# Altium PCB dalang-v1.3_20211125.PcbDoc (part 1 of 5)
Units mil, origin at the board's own origin, x right, y up, seen from the top; angles counter-clockwise.
Board outline 4000 x 3999.92 mil, 4 copper layers (Top, gnd, vcc, Bottom), stack 35.4 mil thick; 365 components, 335 nets, 1640 pads, 1414 vias.
Unrouted connection lines stored in the file: 894.
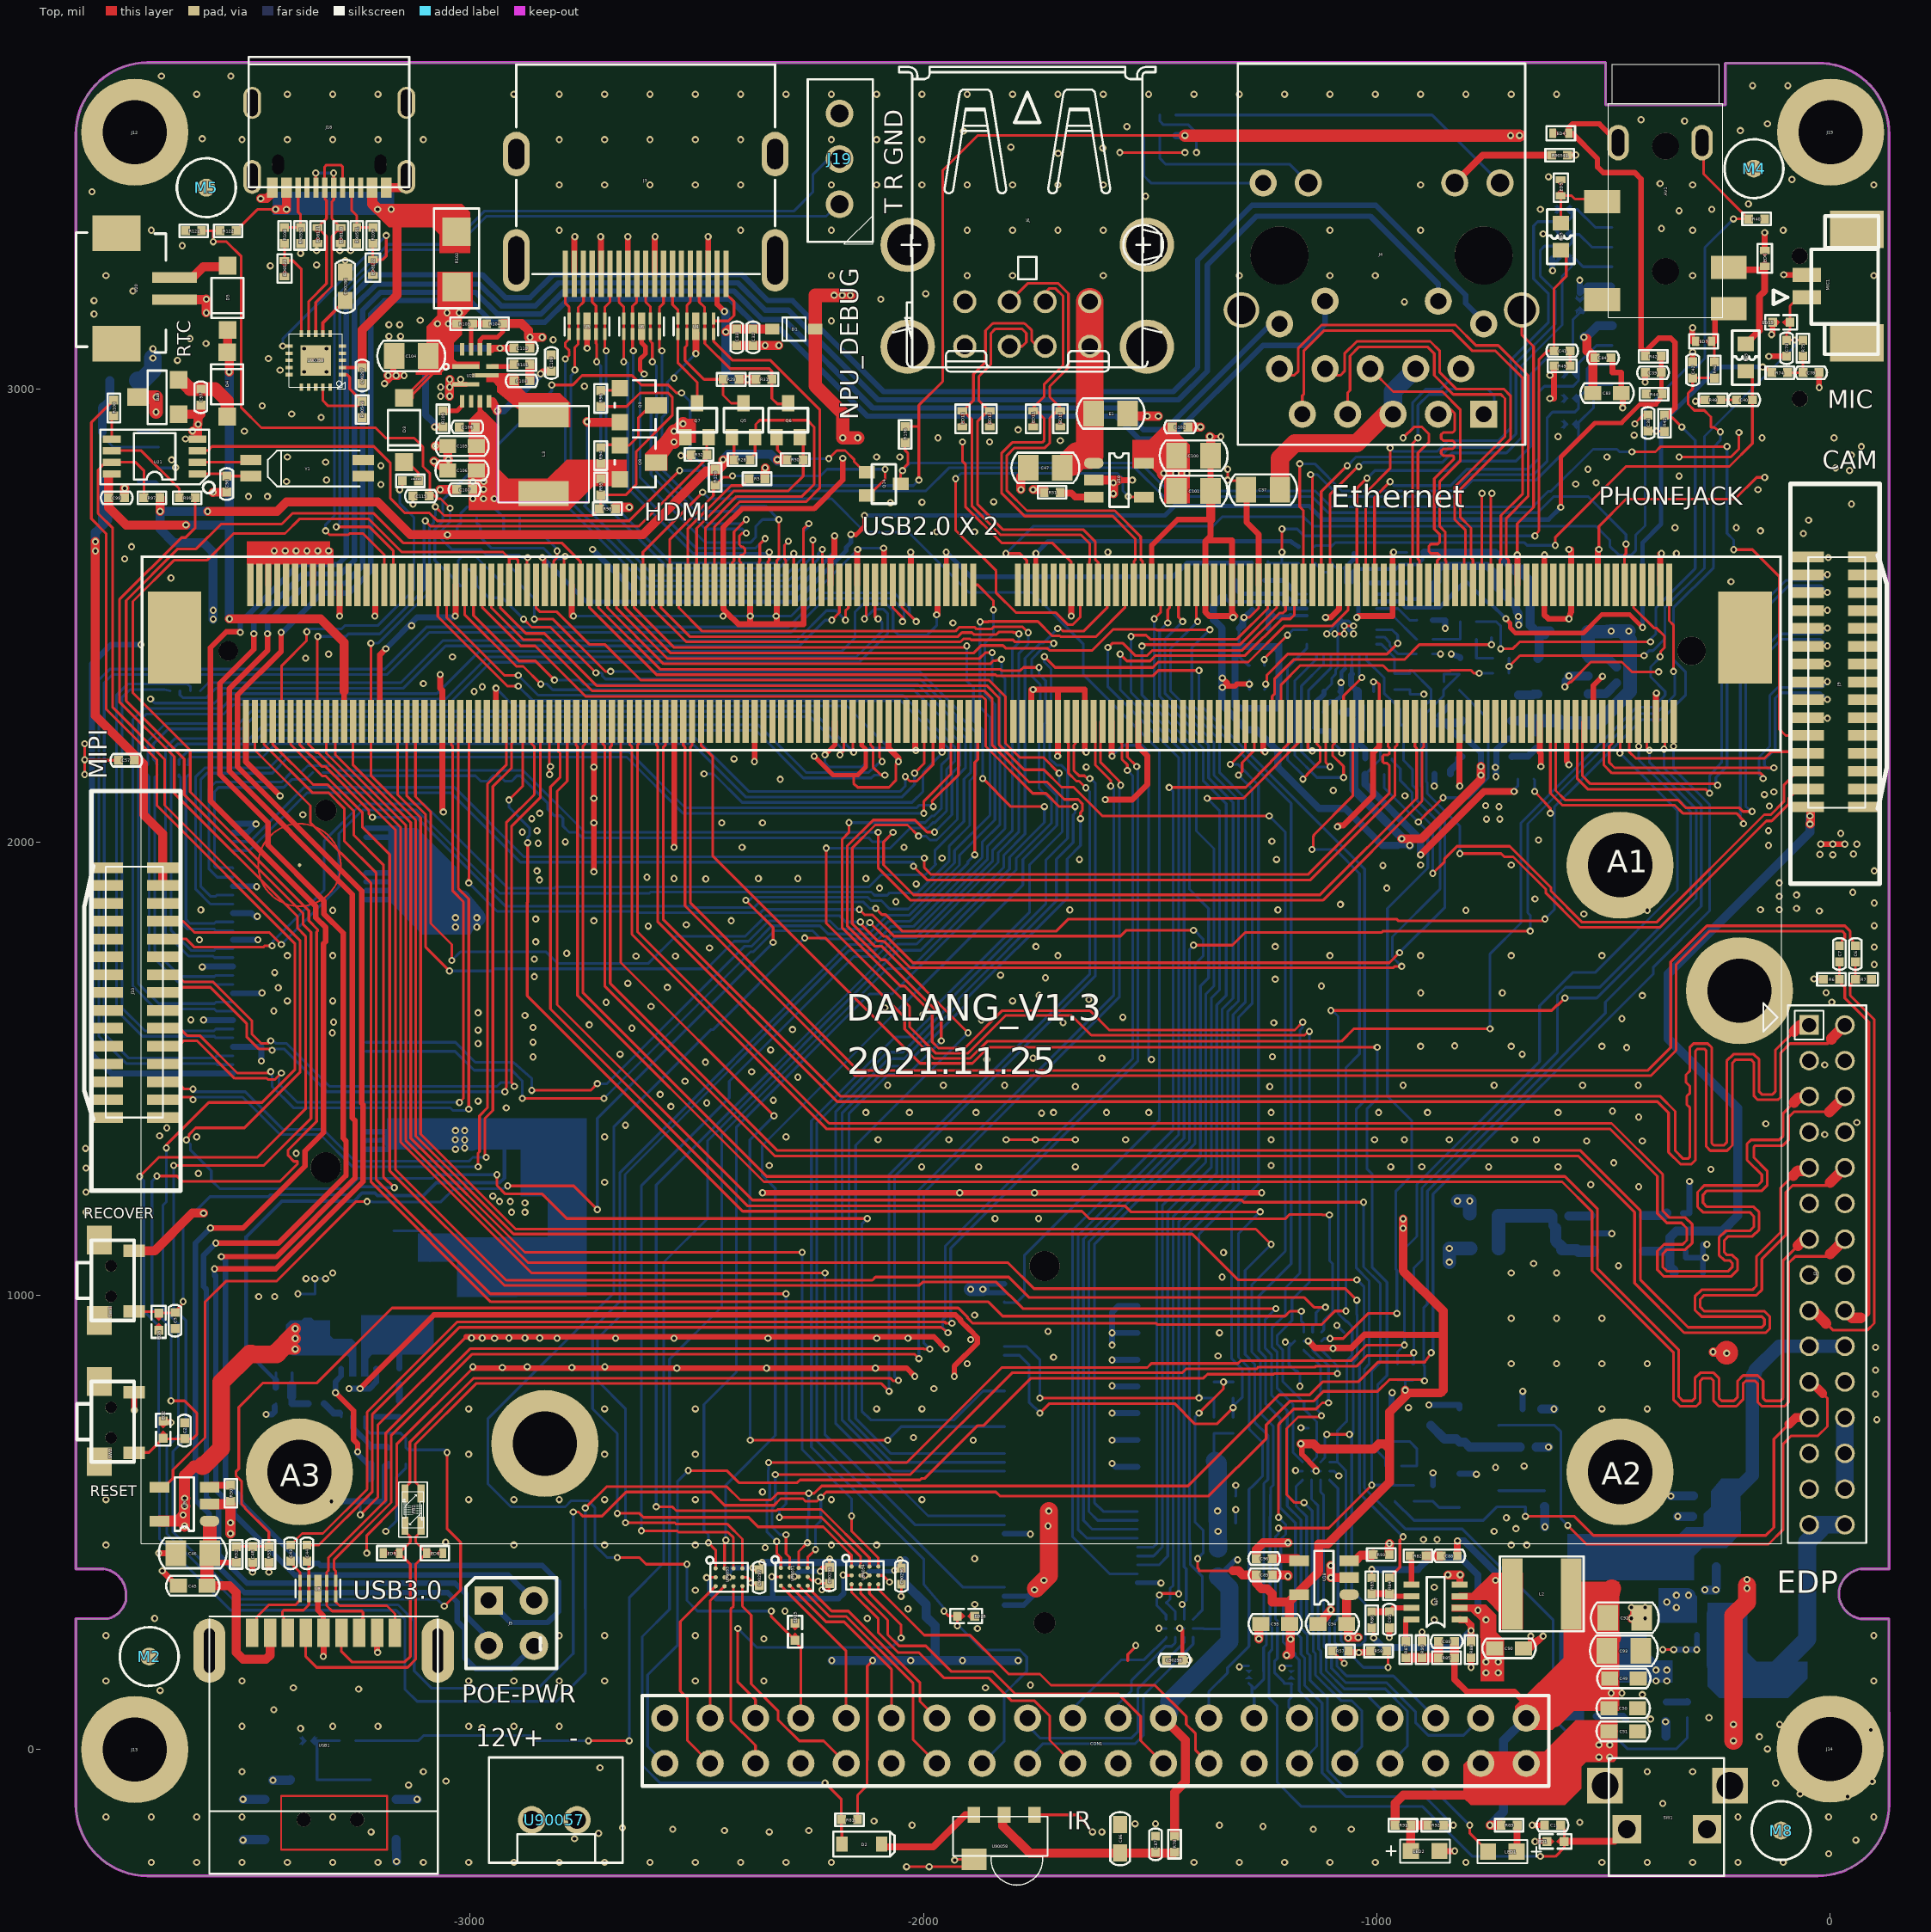
[diagram p0: Top view]
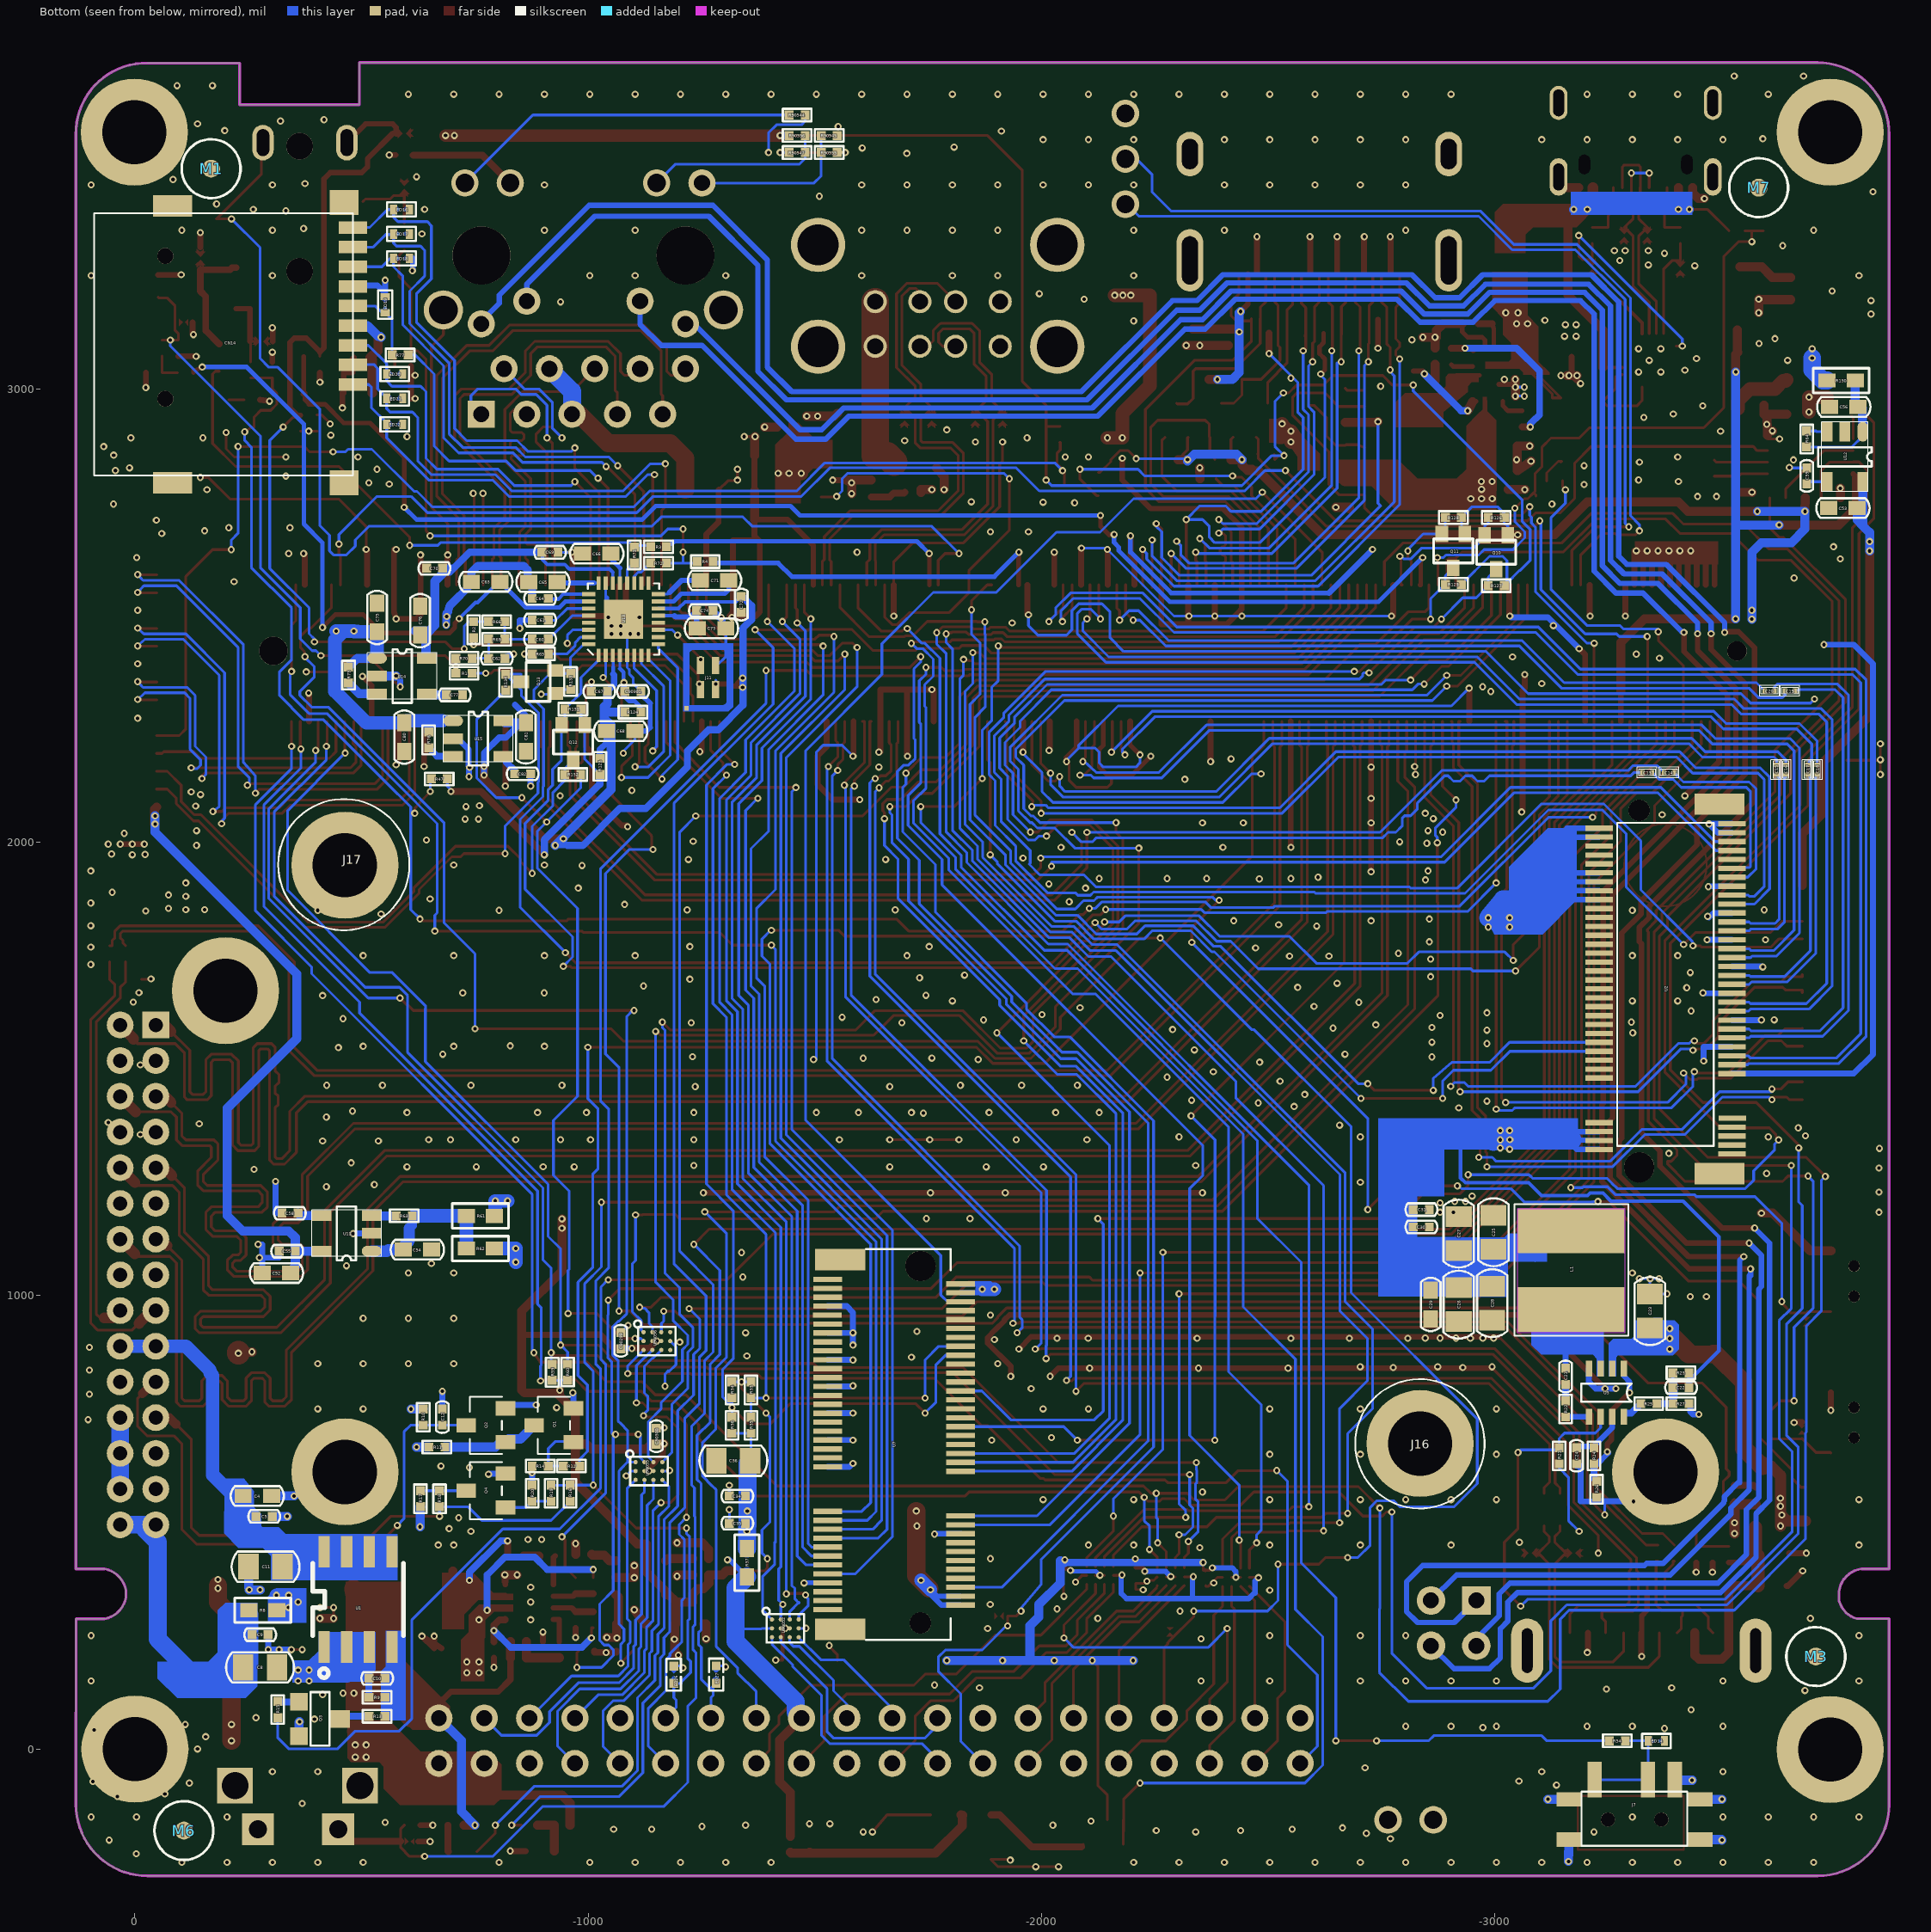
[diagram p1: Bottom view, seen from below]
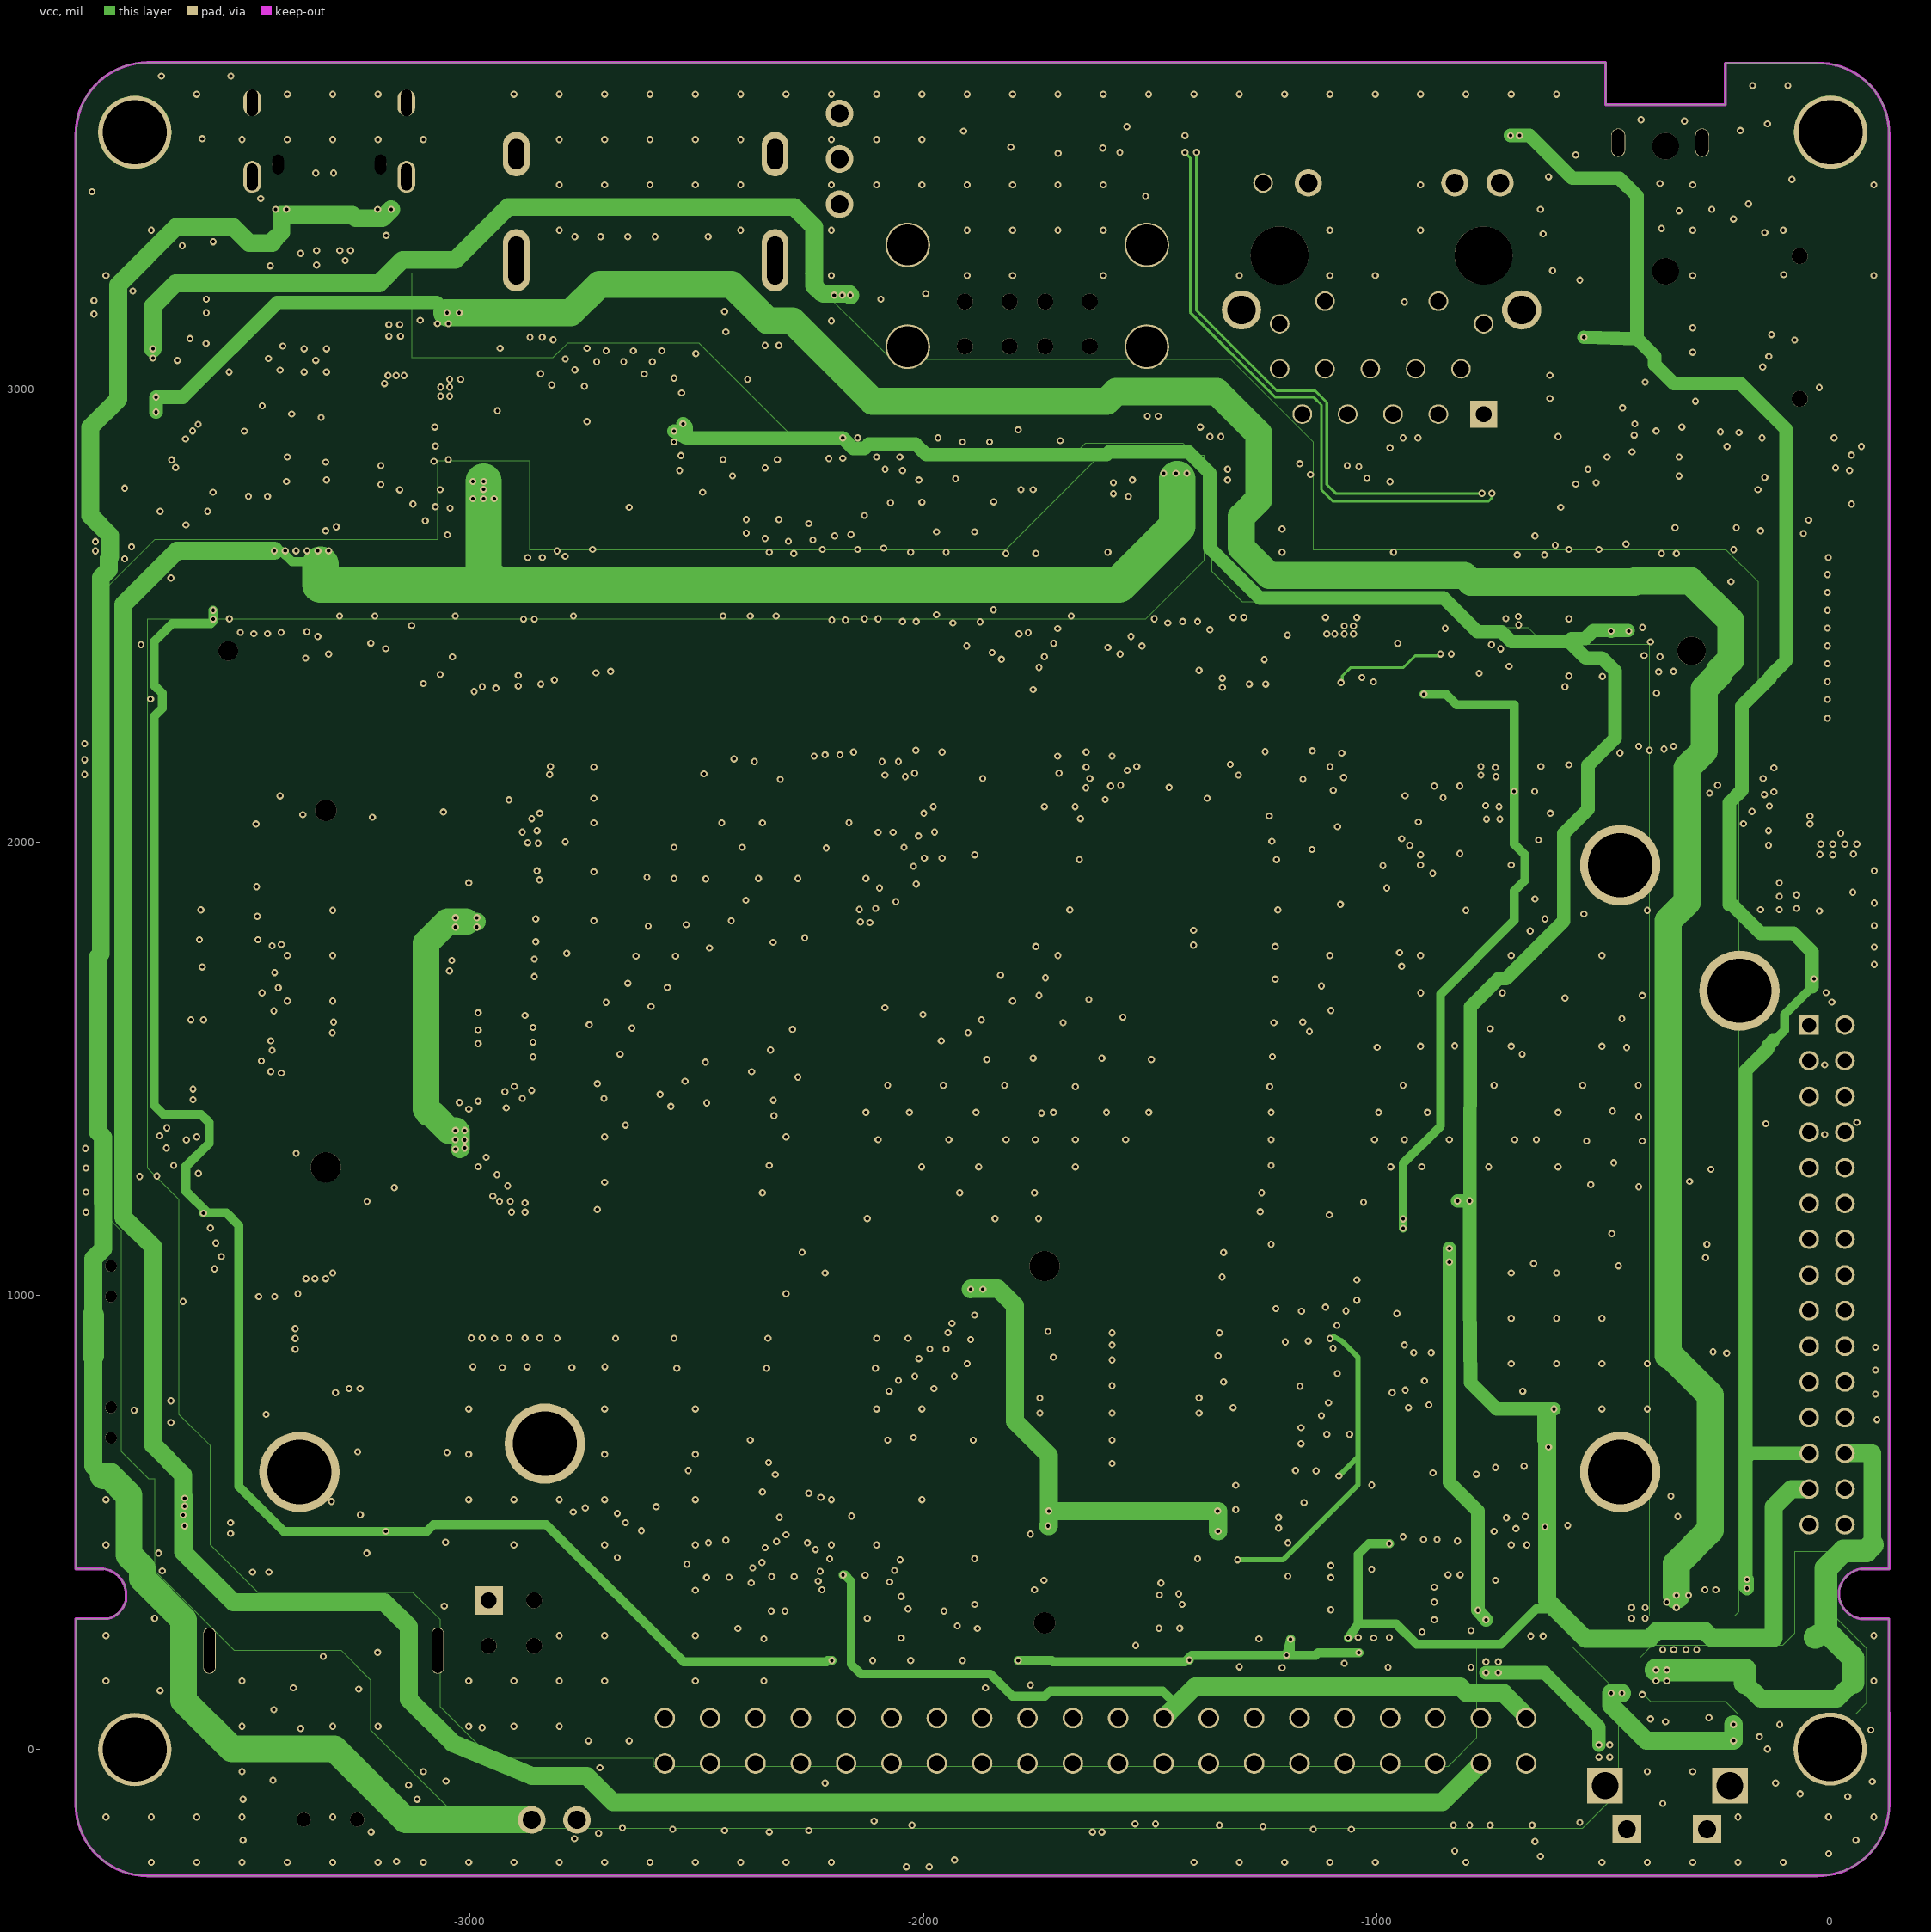
[diagram p2: vcc]

## Layer stack, top to bottom
Solder Mask Top: solder mask 0.4, Solder Resist, Dk 3.5
Top: signal copper 1.35
Dielectric 1: dielectric 10, FR-4, Dk 4.3
gnd: signal copper 1.35
Dielectric2: dielectric 10, FR-4, Dk 4.3
vcc: signal copper 1.35
Dielectric3: dielectric 10, FR-4, Dk 4.3
Bottom: signal copper 1.35
Solder Mask Bottom: solder mask 0.4, Solder Resist, Dk 3.5

## Board outline
-3869.69,3561.42 cw(c-3711.65,3561.97) -3712.2,3720 -495,3720 -495,3627 -231,3627 -231,3718.9 -27.17,3718.9 -27.16,3718.9 cw(c-25.26,3563.32) 130.31,3561.42 130.31,397.24 67.32,397.24 ccw(c77.69,339.63) 20.08,350 20.08,334.25 20.07,334.29 ccw(c77.86,344.79) 67.32,287.01 129.92,287.01 130.31,-122.44 130.31,-122.57 cw(c-27.04,-122.57) -27.17,-279.92 -3712.2,-279.92 -3712.11,-279.92 cw(c-3712.11,-122.34) -3869.69,-122.44 -3869.69,287.4 -3798.82,287.4 -3798.78,287.41 ccw(c-3812.9,340.85) -3759.45,326.77 -3759.45,348.03 ccw(c-3815.55,341.14) -3808.66,397.24 -3869.69,397.24

## Design rules (kind name [scope] priority, off if disabled: settings)
Clearance "Clearance - Default - DEFAULT- SMD" [IsVia vs IsSMTPin] p1: gap=0 ignorepadtopadclearanceinfootprint=FALSE
Clearance "Clearance - Default - DEFAULT - Via" [IsVia vs IsVia] p2: gap=0 ignorepadtopadclearanceinfootprint=FALSE
Clearance "Clearance - Default - DEFAULT - Net" [All] p3: gap=5 ignorepadtopadclearanceinfootprint=FALSE except(0: Arc-Hole Track-Hole SMDPad-Hole THPad-Hole Via-Hole Fill-Hole Poly-Hole Region-Hole Text-Hole; 4.76: Arc-THPad Track-THPad; 10: SMDPad-Fill SMDPad-Poly SMDPad-Region THPad-Fill THPad-Poly THPad-Region Text-Text)
ComponentClearance "ComponentClearance - Default - DEFAULT" [All] p1: gap=6 collisioncheckmode=3 verticalgap=10 showdistances=FALSE
DiffPairsRouting "DiffPairsRouting - DiffPair - Default" [All] p1: maxlimit=5.91 minlimit=5.91 mostfreqgap=5.91 toplayer_minwidth=5.91 toplayer_maxwidth=5.91 toplayer_prefwidth=5.91 midlayer1_minwidth=5.91 midlayer1_maxwidth=5.91 midlayer1_prefwidth=5.91 midlayer2_minwidth=5.91 midlayer2_maxwidth=5.91 midlayer2_prefwidth=5.91 bottomlayer_minwidth=5.91 bottomlayer_maxwidth=5.91 bottomlayer_prefwidth=5.91 maxuncoupledlength=500
FanoutControl Fanout_SOIC [IsSOIC] p1: bgadir=Out bgaviamode=Centered fanoutstyle=Auto fanoutdirection=Alternating viagrid=1 // Fanout_SOIC (Default Rule)
FanoutControl Fanout_Small [(CompPinCount < 5)] p3: bgadir=Out bgaviamode=Centered fanoutstyle=Auto fanoutdirection=OutThenIn viagrid=1 // Fanout_Small (Default Rule)
FanoutControl Fanout_BGA [IsBGA] p4: bgadir=Out bgaviamode=Centered fanoutstyle=Auto fanoutdirection=Alternating viagrid=1 // Fanout_BGA (Default Rule)
HoleToHoleClearance "HoleToHoleClearance - Default - DEFAULT" [All] p1: gap=6 allowstackedmicrovias=TRUE
Length "Default Length" [All] p1: maxlimit=50000 minlimit=0
MaxMinImpedance "Default Impedance" [All] p1: minimum=50.00 maximum=150.0
ParallelSegment "Default Parallel Segment Adjasent" [All] p1: limit=1000 gap=200
ParallelSegment "Default Parallel Segment Same Layer" [All] p2: limit=1000 gap=200
PlaneClearance "PlaneClearance - FootPrint 'SMARC-314C-1'" [HasFootprint('SMARC-314C-1')] p1: clearance=0 // PAD - Power Plane Clearance
PlaneClearance "PlaneClearance - FootPrint 'SMARC-314C-DEL'" [HasFootprint('SMARC-314C-DEL')] p2: clearance=0 // PAD - Power Plane Clearance
PlaneClearance "PlaneClearance - FootPrint 'SMARC-314C'" [HasFootprint('SMARC-314C')] p3: clearance=0 // PAD - Power Plane Clearance
PlaneConnect "Default PlaneConnect" [All] p1: planeconnectstyle=Relief reliefexpansion=20 reliefentries=0 reliefconductorwidth=15 reliefairgap=10
PolygonConnect "PolygonConnect - Default SMT" [IsSMTPin] p1: connectstyle=Direct reliefconductorwidth=10 reliefentries=4 polygonreliefangle="45 Angle" airgapwidth=10
PolygonConnect "PolygonConnect - Default Pad" [All] p2: connectstyle=Relief reliefconductorwidth=15 reliefentries=4 polygonreliefangle="45 Angle" airgapwidth=10
RoutingLayers "RoutingLayers - Default - DEFAULT" [All] p1: top layer_v5=TRUE mid layer 1_v5=TRUE mid layer 2_v5=TRUE bottom layer_v5=TRUE
RoutingPriority "RoutingPriority - Default - DEFAULT" [All] p1: routingpriority=3
RoutingTopology "Default Routing Topology" [All] p1: topology=Shortest
RoutingVias "RoutingVias - Default - DEFAULT" [All] p1: holewidth=7.87 width=15.75 viastyle="Through Hole" minholewidth=7.87 minwidth=15.75 maxholewidth=7.87 maxwidth=15.75
SMDToCorner "SMDToCorner - Default - DEFAULT" [All] p1: distance=0
SolderMaskExpansion [All] p1: expansion=4
Width "Default Width" [All] p1: maxlimit=200 minlimit=3.94 preferedwidth=5.91
19 further rules are at their usual default settings.

## Classes and differential pairs
differential pair TYPEC0_TX1: +TYPEC0_TX1P -TYPEC0_TX1N
differential pair TYPEC0_RX1: +TYPEC0_RX1P -TYPEC0_RX1N
differential pair TYPEC0_D: +TYPEC0_DP -TYPEC0_DM
differential pair HOST1_D: +HOST1_DM -HOST1_DP
differential pair HOST0_D: +HOST0_DM -HOST0_DP

## Components (designator, comment, footprint, x,y, rotation, side; value= is the part's Value field where it differs from the comment)
AV1 "PJ-327A" PJ-327A -362.99,3535.43 r270 top
C1 "C0402" C0402 -612,-168 r180 top
C2 "C0402" C0402 -3630,702 r90 top
C3 "C0402" C0402 -3651,945 r270 top
C4 "C0603" C0603 -270,558 r180 bottom
C5 "C0402" C0402 -285,513 r180 bottom
C6 "C0402" C0402 56.1,1753.94 r270 top
C7 "C0402" C0402 20.67,1753.94 r270 top
C8 "C0805" C0805 -276,180 r180 bottom
C9 "C0402" C0402 -276,252 r180 bottom
C10 "C0402" C0402 -534,156 r180 bottom
C11 "C0805" C0805 -288,402 r0 bottom
C12 "C0402" C0402 -678,732 r90 bottom
C13 "C0201" C0201 -3336,2154 r180 bottom
C14 "C0201" C0201 -3384,2154 r180 bottom
C15 "C0201" C0201 -3621,2160 r270 bottom
C16 "C0201" C0201 -3642,2160 r270 bottom
C17 "C0201" C0201 -3690,2160 r270 bottom
C18 "C0201" C0201 -3711,2160 r270 bottom
C19 "C0201" C0201 -3651,2334 r180 bottom
C20 "C0201" C0201 -3606,2334 r180 bottom
C21 "C0402" C0402 -3156,822 r270 bottom
C22 "C0402" C0402 -3410.43,797.24 r180 bottom
C23 "C0805" C0805 -3342,966 r90 bottom
C24 "C0402" C0402 -3180.12,646.65 r90 bottom
C25 "C0805" C0805 -2997.05,1139.76 r90 bottom
C26 "C0805" C0805 -2920.28,980.31 r270 bottom
C27 "C0805" C0805 -2920.28,1136.81 r90 bottom
C28 "C0805" C0805 -2994.09,983.27 r270 bottom
C29 "C0603" C0603 -2858.27,980.31 r270 bottom
C30 "C0402" C0402 -2837.6,1151.57 r180 bottom
C31 "C0402" C0402 -2837.6,1189.96 r180 bottom
C32 "C0402" C0402 -2376,3114 r270 top
C33 "C0402" C0402 -2412,3114 r270 top
C34 "C0402" C0402 -1329,558 r0 bottom
C35 "C0402" C0402 -1329,498 r0 bottom
C36 "C0805" C0805 -1320,636 r0 bottom
C37 "C0805" C0805 -1251,2778 r0 top
C38 "C0402" C0402 -401.57,2924.8 r90 top
C39 "C0402" C0402 -390,3036 r180 top
C40 "C0402" C0402 -189,2976 r180 top
C41 "C0402" C0402 -591,3084 r0 top
C42 "C0402" C0402 -303,3042 r90 top
C43 "C0402" C0402 -3396,432 r270 top
C44 "C0402" C0402 -3360,432 r270 top
C45 "C0603" C0603 -3612,360 r180 top
C46 "C0805" C0805 -3612,432 r180 top
C47 "C0805" C0805 -1731,2826 r180 top
C48 "C0402" C0402 -3480,429 r270 top
C49 "C0603" C0603 -454.72,155.51 r0 top
C50 "C0603" C0603 -456,90 r0 top
C51 "C0603" C0603 -456,39 r0 top
C52 "C0603" C0603 -312,1050 r0 bottom
C53 "C0603" C0603 -3767.72,2737.2 r0 bottom
C54 "C0603" C0603 -623.03,1101.38 r180 bottom
C55 "C0402" C0402 -336,1098 r0 bottom
C56 "C0603" C0603 -3769.55,2960.5 r0 bottom
C57 "C0402" C0402 -3758.25,2180.84 r180 top
C58 "C0402" C0402 -342,1182 r0 bottom
C59 "C0402" C0402 -3687.99,2808.07 r90 bottom
C60 "C0402" C0402 -894,2448 r0 bottom
C61 "C0402" C0402 -894,2490 r0 bottom
C62 "C0402" C0402 -798,2406 r180 bottom
C63 "C0603" C0603 -773.62,2574.8 r0 bottom
C64 "C0402" C0402 -894,2538 r0 bottom
C65 "C0603" C0603 -900,2574 r0 bottom
C66 "C0603" C0603 -1018.7,2636.81 r0 bottom
C67 "C0402" C0402 -1024.61,2332.68 r0 bottom
C68 "C0603" C0603 -1071.65,2245.28 r180 bottom
C69 "C0402" C0402 -915.35,2639.76 r180 bottom
C70 "C0402" C0402 -660.94,2604.56 r0 bottom
C71 "C0603" C0603 -1278.54,2577.76 r0 bottom
C72 "C0402" C0402 -1337.6,2524.61 r270 bottom
C73 "C0603" C0603 -1272,2472 r180 bottom
C74 "C0402" C0402 -1257,2511 r180 bottom
C75 "C0603" C0603 -534,2496 r90 bottom
C76 "C0603" C0603 -628.94,2489.17 r90 bottom
C77 "C0402" C0402 -705,2325 r180 bottom
C78 "C0402" C0402 -42,3036 r0 top
C79 "C0402" C0402 -96,3090 r270 top
C80 "C0603" C0603 -594,2232 r270 bottom
C81 "C0603" C0603 -862.2,2232.28 r270 bottom
C82 "C0402" C0402 -855,2151 r180 bottom
C83 "C0603" C0603 -492,2991 r180 top
C84 "C0402" C0402 -501,3069 r0 top
C85 "C0402" C0402 -1248,384 r0 top
C86 "C0603" C0603 -1566,-198 r270 top
C87 "C0402" C0402 -1488,-210 r270 top
C88 "C0402" C0402 -840,426 r180 top
C89 "C0402" C0402 -846,237 r0 top
C90 "C0603" C0603 -708,222 r0 top
C91 "C0402" C0402 -972,285 r90 top
C92 "C0805" C0805 -452.76,289.37 r0 top
C93 "C0805" C0805 -454.72,216.54 r0 top
C94 "C0603" C0603 -1098,276 r180 top
C95 "C0603" C0603 -1224,276 r180 top
C96 "C0402" C0402 -1248,420 r180 top
C97 "C0402" C0402 -3594,2982 r270 top
C98 "C0402" C0402 -3537,2790 r90 top
C99 "C0402" C0402 -3780,2760 r0 top
C100 "C0805" C0805 -1404,2853 r180 top
C101 "C0805" C0805 -1404,2775 r180 top
C102 "C0402" C0402 -1434,2916 r0 top
C103 "C0402" C0402 -2886,3018 r180 top
C104 "C0805" C0805 -3129.92,3072.83 r180 top
C105 "C0603" C0603 -3018,2874 r180 top
C106 "C0603" C0603 -3018,2820 r180 top
C107 "C0402" C0402 -3012,2778 r180 top
C108 "C0402" C0402 -3006,2916 r180 top
C109 "C0402" C0402 -2820.87,3057.09 r90 top
C110 "C0402" C0402 -2886,3090 r0 top
C115 "C0402" C0402 -3108.27,2763.78 r180 top
C90286 "C0603" C0603 -3275.59,3226.38 r90 top
C90287 "C0402" C0402 -3238.19,3029.53 r90 top
C90295 "C0402" C0402 -2207.53,382.89 r90 top
C90296 "C0402" C0402 -2048.58,381.2 r90 top
C90297 "C0402" C0402 -2362.2,377.95 r90 top
C90298 "C0402" C0402 -1446.46,196.06 r0 top
C90299 "C0402" C0402 -1071.93,900.66 r270 bottom
C90300 "C0402" C0402 -1150.09,690.07 r270 bottom
C90301 "C0402" C0402 -1098.43,2332.68 r180 bottom
CN14 "TF-CKT01-009D" TF-CKT01-009D -66.93,3135.83 r0 bottom
CON1 "DIP40PIN-2.54MM_FX" DIP40PIN-2.54MM_FX -1620.47,18.11 r180 top
D1 "SOD_323" SOD_323 -2286,3132 r180 top
D2 "SOD323" SOD323 -2136,-210 r0 top
D3 "SOD_123" SOD_123 -3145.67,2909.45 r270 top
D4 "SOD_123" SOD_123 -3536,3010 r90 top
D5 "SOD_123" SOD_123 -3535,3201 r270 top
E1 "C0805" C0805 -1587,2946 r0 top
ED1 "ESD0402" ESD0402 -606,-204 r180 top
ED2 "ESD0402" ESD0402 -3677.17,704.72 r90 top
ED3 "ESD0402" ESD0402 -3687,942 r270 top
ED4 "E0402N" E0402N#1 -594,3564 r180 top
ED5 "E0402N" E0402N#2 -594,3444 r90 top
ED6 "E0402N" E0402N#1 -144,3288 r90 top
ED7 "E0402N" E0402N#1 -279,3105 r180 top
ED8 "E0402N" E0402N#1 -3078,432 r0 top
ED9 "E0402N" E0402N#1 -3174,432 r180 top
ED10 "E0402N" E0402N#3 -1698,2934 r270 top
ED11 "E0402N" E0402N#3 -1758,2934 r270 top
ED12 "E0402N" E0402N#4 -1854,2934 r270 top
ED13 "E0402N" E0402N#5 -1914,2934 r270 top
ED14 "E0402N" E0402N#3 -3356.3,17.72 r180 bottom
ED15 "ESD0402" ESD0402 -108,3147 r180 top
ED16 "E0402N" E0402N#1 -588,3396 r180 bottom
ED17 "E0402N" E0402N#1 -588,3342 r180 bottom
ED18 "E0402N" E0402N#3 -588,3288 r180 bottom
ED19 "E0402N" E0402N#2 -552,3186 r90 bottom
ED20 "E0402N" E0402N#6 -573,3033 r180 bottom
ED21 "E0402N" E0402N#2 -573,2979 r180 bottom
ED22 "E0402N" E0402N#2 -573,2922 r180 bottom
ED25 "ESD0402" ESD0402 -2283.23,259.04 r90 top
ED26 "ESD0402" ESD0402 -1188.7,164.18 r90 bottom
ED27 "ESD0402" ESD0402 -1282.14,164.44 r90 bottom
ED28 "ESD0402" ESD0402 -1905.56,293.12 r0 top
ED8120 "E0402N" E0402N#5 -3285.43,3338.58 r270 top
ED8121 "E0402N" E0402N#5 -3336.61,3338.58 r270 top
ED8122 "E0402N" E0402N#1 -3214.57,3267.72 r270 top
ED8123 "E0402N" E0402N#1 -3409.45,3265.75 r270 top
FB2 "COMMON-COIL4P" COMMON-COIL4P -3126,528 r90 top
J1 "SMARC-314C-DEL" SMARC-314C-DEL -305.51,2422.05 r270 top
J2 "PH2P0-2X15-S30P" PH2P0-2X15-S30P -46,1597 r270 top
J3 "HDMIA19_HDMI_01A" HDMIA19_HDMI_01A -2609.84,3431.1 r0 top
J4 "RJ45_HRK1" RJ45_HRK1 -764.17,2944.49 r180 top
J5 "DIP4-2.54MM-2X2_FX" DIP4-2.54MM-2X2_FX -2959.06,327.56 r0 top
J6 "USB-AF-DUAL" USB-AF-DUAL -1770.87,3317.72 r270 top
J7 "LD-020" LD-020 -3249.21,-155.51 r180 bottom
J9 "FPC15PIN-1.0MM-LS1" FPC15PIN-1.0MM-LS1 -48,2078 r90 top
J10 "FPC15PIN-1.0MM-LS1" FPC15PIN-1.0MM-LS1 -3678,1944 r270 top
J11 "SDO-4030" SDO-4030 -1281,2337 r180 bottom
J12 "H3.8MM" H3.8MM -3739.76,3566.14 r0 top
J13 "H3.8MM" H3.8MM -3739.76,-1.18 r0 top
J14 "H3.8MM" H3.8MM 0,0 r0 top
J15 "H3.8MM" H3.8MM 1.18,3566.54 r0 top
J16 "H2.8MM-1" H2.8MM-1 -2835.04,673.62 r180 bottom
J17 "H2.8MM-1" H2.8MM-1 -199.61,1672.83 r180 bottom
J18 "TYPEC-16PIN-GY" TYPEC-16PIN-GY -3480.71,3631.1 r180 top
J19 "3PIN_254" 3PIN_254 -2185.04,3407.48 r180 top
L1 "IND-6X6" IND-6X6 -3168,1056 r90 bottom
L2 "IND-4X4" IND-4X4 -636,342 r0 top
L3 "IND-5020" IND-5020 -2838,2856 r270 top
LED1 "LED0603" LED0603 -722.83,-226.38 r180 top
LED2 "LED0603" LED0603 -893.31,-225.2 r0 top
M1 "MARK-1" MARK-1 -168,3486 r180 bottom
M2 "MARK-1" MARK-1 -3708,204 r0 top
M3 "MARK-1" MARK-1 -3708,204 r180 bottom
M4 "MARK-1" MARK-1 -168,3486 r0 top
M5 "MARK-1" MARK-1 -3582,3444 r0 top
M6 "MARK-1" MARK-1 -108,-180 r180 bottom
M7 "MARK-1" MARK-1 -3582,3444 r180 bottom
M8 "MARK-1" MARK-1 -108,-180 r0 top
MIC1 "CN1X2-1.25-SMT" CN1X2-1.25-SMT -51.18,3202.36 r270 top
Q1 "SOT_23" SOT_23 -924,714 r270 bottom
Q2 "SOT_23" SOT_23 -774,714 r270 bottom
Q3 "SOT23" SOT23 -408,66 r270 bottom
Q4 "SOT_23" SOT_23 -774,570 r270 bottom
Q5 "SOT_323" SOT_323 -2397,2931 r0 top
Q6 "SOT_323" SOT_323 -2298,2931 r0 top
Q7 "SOT_323" SOT_323 -2499,2931 r0 top
Q8 "S0T-23" S0T-23 -2631,2838 r270 top
Q9 "S0T-23" S0T-23 -2631,2964 r270 top
Q10 "SOT_323" SOT_323 -3002.95,2639.76 r0 bottom
Q11 "SOT_323" SOT_323 -2908.46,2642.72 r0 bottom
Q12 "SOT_323" SOT_323 -966.54,2221.26 r0 bottom
Q13 "SOT_323" SOT_323 -889.37,2353.94 r90 bottom
Q14 "SOT_323" SOT_323 -2087.6,2790.35 r270 top
R1 "R0402" R0402 -726,2373 r0 bottom
R2 "R0402" R0402 -747,2469 r90 bottom
R3 "R0402" R0402 -1155,2652 r180 bottom
R4 "R0402" R0402 -1257.87,2619.09 r180 bottom
R5 "R0402" R0402 -2367,2802 r180 top
R6 "R0402" R0402 2.95,1697.83 r180 top
R7 "R0402" R0402 73.82,1697.83 r0 top
R8 "R0603" R0603 -282,306 r0 bottom
R9 "R0402" R0402 -534,114 r180 bottom
R10 "R0402" R0402 -636,732 r90 bottom
R11 "R0402" R0402 -666,666 r0 bottom
R12 "R0402" R0402 -963,624 r0 bottom
R13 "R0402" R0402 -534,72 r0 bottom
R14 "R0402" R0402 -894,624 r180 bottom
R15 "R0402" R0402 -315,87 r90 bottom
R16 "R0402" R0402 -960,564 r270 bottom
R17 "R0402" R0402 -630,552 r270 bottom
R18 "R0402" R0402 -672,552 r90 bottom
R19 "R0402" R0402 -918,564 r270 bottom
R20 "R0402" R0402 -876,564 r270 bottom
R21 "R0402" R0402 -3141.73,646.65 r90 bottom
R22 "R0402" R0402 -3156,750 r270 bottom
R23 "R0402" R0402 -3410.43,829.72 r0 bottom
R24 "R0402" R0402 -3218.5,646.65 r90 bottom
R25 "R0402" R0402 -3339.57,761.81 r180 bottom
R26 "R0402" R0402 -3224.41,572.83 r270 bottom
R27 "R0402" R0402 -3410.43,761.81 r180 bottom
R28 "R0402" R0402 -2400,2844 r0 top
R29 "R0402" R0402 -2424,3021 r180 top
R30 "R0402" R0402 -2283,2844 r0 top
R31 "R0402" R0402 -2352,3021 r0 top
R32 "R0402" R0402 -2495.08,2855.31 r0 top
R33 "R0402" R0402 -1359,792 r90 bottom
R34 "R0402" R0402 -1317,792 r90 bottom
R35 "R0402" R0402 -1359,714 r90 bottom
R36 "R0402" R0402 -1317,714 r90 bottom
R37 "R0603" R0603 -1350,411 r90 bottom
R40 "R0402" R0402 -162,3375 r180 top
R41 "R0402" R0402 -365.35,2924.41 r270 top
R42 "R0402" R0402 -390,3072 r180 top
R43 "L0603" L0603 -594,3336 r270 top
R44 "R0402" R0402 -388.19,2988.58 r0 top
R45 "L0603" L0603 -186,3069 r270 top
R46 "R0402" R0402 -255,3042 r270 top
R47 "R0402" R0402 -671.26,2139.76 r0 bottom
R48 "R0402" R0402 -258,2976 r0 top
R49 "R0402" R0402 -591,3051 r0 top
R50 "R0402" R0402 -3528,564 r270 top
R51 "R0402" R0402 -1716,2772 r180 top
R52 "R0402" R0402 -3516,429 r90 top
R53 "R0402" R0402 -3444,429 r270 top
R54 "R0402" R0402 -3270,18 r180 bottom
R57 "R0402" R0402 -1080,216 r0 top
R58 "R0402" R0402 -996,216 r180 top
R59 "R0402" R0402 -920.52,831 r270 bottom
R60 "R0402" R0402 -954.49,831.35 r270 bottom
R61 "R0603" R0603 -762,1176 r0 bottom
R62 "R0603" R0603 -762,1104 r0 bottom
R63 "R0402" R0402 -594,1176 r0 bottom
R64 "R0402" R0402 -3687.75,2889.63 r90 bottom
R65 "R0402" R0402 -894.69,2415.35 r180 bottom
R66 "R0402" R0402 -798,2487 r0 bottom
R69 "R0402" R0402 -798,2448 r0 bottom
R70 "R0402" R0402 -726,2406 r0 bottom
R71 "R0402" R0402 -1101.38,2633.86 r270 bottom
R72 "R0402" R0402 -1155,2616 r0 bottom
R73 "R0402" R0402 -471,2369 r270 bottom
R74 "R0402" R0402 -111,3036 r0 top
R75 "R0402" R0402 -60,3090 r90 top
R76 "R0402" R0402 -648,2226 r270 bottom
R77 "R0402" R0402 -585,3075 r0 bottom
R78 "R0402" R0402 -1446,-210 r90 top
R81 "R0402" R0402 -2163,-156 r0 top
R82 "R0402" R0402 -909,426 r180 top
R83 "R0402" R0402 -1011,360 r90 top
R84 "R0402" R0402 -972,360 r90 top
R85 "R0402" R0402 -846,201 r180 top
R86 "R0402" R0402 -1011,285 r90 top
R87 "R0402" R0402 -936,219 r270 top
R88 "R0402" R0402 -792,219 r270 top
R89 "R0402" R0402 -708,-168 r0 top
R90 "R0402" R0402 -900,219 r90 top
R91 "R0402" R0402 -942,-168 r0 top
R92 "R0402" R0402 -870,-168 r180 top
R93 "R0402" R0402 -990,429 r180 top
R94 "R0402" R0402 -2712,2853 r270 top
R95 "R0402" R0402 -2712,2784 r270 top
R96 "R0402" R0402 -2712,2979 r270 top
R97 "R0402" R0402 -3702,2760 r0 top
R98 "R0402" R0402 -2697,2736 r0 top
R99 "R0402" R0402 -3624,2760 r0 top
R100 "R0402" R0402 -3786,2958 r90 top
R101 "R0402" R0402 -2886,3054 r0 top
R102 "R1206" R1206 -3030,3288 r90 top
R103 "R0402" R0402 -3012,3144 r180 top
R104 "R0402" R0402 -2946,3144 r180 top
R105 "R0402" R0402 -3060,2934 r270 top
R108 "R0402" R0402 -3409.45,3338.58 r270 top
R109 "R0402" R0402 -3214.57,3338.58 r270 top
R120 "R0402" R0402 -2459.65,2805.12 r90 top
R121 "R0402" R0402 -3610,3349 r0 top
R122 "R0402" R0402 -3534,3349 r0 top
R123 "R0402" R0402 -1025.6,2167.55 r90 bottom
R124 "R0402" R0402 -1098.43,2287.01 r180 bottom
R126 "R0402" R0402 -3002.95,2716.54 r0 bottom
R127 "R0402" R0402 -3002.95,2565.94 r0 bottom
R128 "R0402" R0402 -2908.46,2716.54 r0 bottom
R129 "R0402" R0402 -2908.46,2568.9 r0 bottom
R130 "R0603" R0603 -3763.91,3018.6 r180 bottom
R131 "R0402" R0402 -966.14,2293.7 r0 bottom
R132 "R0402" R0402 -965.75,2149.61 r0 bottom
R133 "R0402" R0402 -961.02,2354.72 r90 bottom
R134 "R0402" R0402 -817.72,2353.15 r90 bottom
R136 "R0402" R0402 -2040.35,2899.61 r270 top
R90541 "R0402" R0402 -596.46,3515.75 r0 top
R90544 "R0402" R0402 -1460.63,3604.33 r180 bottom
R90545 "R0402" R0402 -1531.5,3559.06 r180 bottom
R90547 "R0402" R0402 -1460.63,3521.65 r0 bottom
R90549 "R0402" R0402 -3238.19,2954.72 r90 top
R90551 "R0402" R0402 -3250,3338.58 r90 top
R90552 "R0402" R0402 -3374.02,3338.58 r90 top
R90555 "R0402" R0402 -1531.5,3521.65 r180 bottom
R90556 "R0402" R0402 -1460.63,3559.06 r0 bottom
R90557 "R0402" R0402 -3131.89,2797.24 r180 top
SW1 "SW_4_DIP" SW_4_DIP -220.87,-80.71 r180 top
SW2 "SW8-KEY" SW8-KEY -3797.24,722.05 r270 top
SW3 "SW8-KEY" SW8-KEY -3797.24,1033.86 r270 top
U1 "SOP8-50-150" SOP8-50-150 -492,330 r180 bottom
U2 "M2_NGFF_KEY_M" M2_NGFF_KEY_M -3376.38,1676.77 r270 bottom
U3 "SOT23-8" SOT23-8 -3246,786 r0 bottom
U4 "SON10_2R50X1R00X0R50" SON10_2R50X1R00X0R50 -2502,3138 r0 top
U5 "SON10_2R50X1R00X0R50" SON10_2R50X1R00X0R50 -2742,3138 r0 top
U6 "SON10_2R50X1R00X0R50" SON10_2R50X1R00X0R50 -2622,3138 r0 top
U7 "M2_NGFF_KEY_E" M2_NGFF_KEY_E -1674.8,671.65 r90 bottom
U8 "SON10_2R50X1R00X0R50" SON10_2R50X1R00X0R50 -3336,354 r180 top
U9 "SOT25" SOT25 -3630,540 r90 top
U10 "SOT25" SOT25 -1569,2799 r270 top
U11 "SOT_23_5" SOT_23_5 -522,1098 r0 bottom
U12 "SOT_23_5" SOT_23_5 -3811.44,2905.61 r270 bottom
U13 "QFN32P4X4" QFN32P4X4 -1077.76,2492.13 r90 bottom
U14 "SOT_23_5" SOT_23_5 -534,2406 r180 bottom
U15 "SOT_23_5" SOT_23_5 -702,2268 r180 bottom
U17 "SOT23-8" SOT23-8 -870,324 r90 top
U18 "SOT25" SOT25 -1116,378 r90 top
U19 "SOT23" SOT23 -3690,2982 r90 top
U20 "SMD-2P-1.25" SMD-2P-1.25 -3662.2,3221.65 r270 top
U21 "MSOP8" MSOP8 -3696,2850 r180 top
U22 "QFN12_2R00X3R00X1R00" QFN12_2R00X3R00X1R00 -2988,3030 r0 top
U90051 "CSP-12" CSP-12 -2314.53,360.18 r90 top
U90052 "CSP-12" CSP-12 -1405.12,246.46 r90 bottom
U90053 "CSP-12" CSP-12 -2458.44,359 r90 top
U90054 "CSP-12" CSP-12 -2158.46,363.19 r90 top
U90055 "CSP-12" CSP-12 -1104.33,593.5 r90 bottom
U90056 "CSP-12" CSP-12 -1121.78,880.1 r90 bottom
U90057 "2PIN_2_54" 2PIN_2_54 -2864.17,-156.5 r0 top
U90058 "IRM-V538$2F$TR1" IRM-V538$2F$TR1 -1798.23,-236.22 r180 top
U90059 "CH224D" CH224D -3340.55,3062.99 r180 top
USB1 "USB30-L1" USB30-L1 -3323.23,256.3 r0 top
Y1 "CRY-MC146" CRY-MC146 -3348,2826 r0 top

## Footprints (in the part's own frame and the unit in brackets; to place one, negate y for a bottom-side part, rotate by r counter-clockwise, add the part's x,y. Pads: shape width x height; smd on the part's side, far side on the other; paste and mask are expansions set on the pad)
2PIN_2_54 [mil]
  round 61.02 hole 40.16 mask+1.97: 1(0,0) 2(100,0)
  silkscreen extent -94,-94 201,138
3PIN_254 [mil]
  round 61.02 hole 40.16 mask+1.97: 1(0,0) 2(0,-100) 3(0,-200)
  silkscreen extent -74,-276 70,88
C0201 [mil]
  rect 9.84x11.81 smd: 1(-10.83,0) 2(10.83,0)
  silkscreen extent -22,-12 22,12
C0402 [mm]
  rrect0% 0.5x0.5 smd: 1(-0.45,0)
  rect 0.5x0.5 smd: 2(0.45,0)
  silkscreen extent -0.88,-0.35 0.89,0.35
C0603 [mm]
  rect 0.96x0.8 smd: 1(-0.8,0) 2(0.8,0)
  silkscreen extent -1.5,-0.55 1.49,0.55
C0805 [mm]
  rect 1.15x1.45 smd: 1(-0.95,0) 2(0.95,0)
  silkscreen extent -1.9,-0.85 1.9,0.85
CH224D [mm]
  rect 0.4x0.2 smd: 1(-1.5,0.8) 2(-1.5,0.4) 3(-1.5,0) 4(-1.5,-0.4) 5(-1.5,-0.8) 11(1.5,-0.8) 12(1.5,-0.4) 13(1.5,0) 14(1.5,0.4) 15(1.5,0.8)
  rect 0.2x0.4 smd: 6(-0.8,-1.5) 7(-0.4,-1.5) 8(0,-1.5) 9(0.4,-1.5) 10(0.8,-1.5) 16(0.8,1.5) 17(0.4,1.5) 18(0,1.5) 19(-0.4,1.5) 20(-0.8,1.5)
  rect 1.7x1.7 smd: 21(0,0)
  silkscreen extent -1.65,-1.5 1.5,1.6
CN1X2-1.25-SMT [mm]
  rect 0.8x1.6 smd: 1(0,0) 2(-1.25,0)
  rect 2.1x3 smd: 3(-3.8,2.8) 4(2.55,2.8)
  silkscreen extent -4.55,-1.88 3.2,4.02
COMMON-COIL4P [mm]
  rect 1x0.4 smd: 1(0.9,-0.45) 2(-0.9,-0.45) 3(-0.9,0.45) 4(0.9,0.45)
  silkscreen extent -1.55,-0.8 1.55,0.8
CRY-MC146 [mm]
  rect 1.2x0.6 smd: 1(-3.45,-0.46) 2(-3.45,0.44) 3(2.85,0.44) 4(2.85,-0.46)
  silkscreen extent -2.49,-1.04 2.65,0.96
CSP-12 [mm]
  round 0.24 smd: A1(0,0) A2(0.5,0) A3(1,0) B1(0,-0.5) B2(0.5,-0.5) B3(1,-0.5) C1(0,-1) C2(0.5,-1) C3(1,-1) D1(0,-1.5) D2(0.5,-1.5) D3(1,-1.5)
  silkscreen extent -0.3,-1.8 1.66,0.53
DIP4-2.54MM-2X2_FX [mm]
  round 1.6 / inner round 0.9 / far side round 1.6 hole 0.889: 1(0,-2.54) 2(2.54,-2.54) 4(2.54,0)
  rect 1.6x1.6 hole 0.889: 3(0,0)
  silkscreen extent -1.27,-3.81 3.81,1.27
DIP40PIN-2.54MM_FX [mil]
  rrect100% 60x60 / inner rrect100% 45.28x45.28 / far side rrect100% 60x60 hole 35: 1(-950,-50) 2(-950,50) 3(-850,-50) 4(-850,50) 5(-750,-50) 6(-750,50) 7(-650,-50) 8(-650,50) 9(-550,-50) 10(-550,50) 11(-450,-50) 12(-450,50) 13(-350,-50) 14(-350,50) 15(-250,-50) 16(-250,50) 17(-150,-50) 18(-150,50) 19(-50,-50) 20(-50,50) 21(50,-50) 22(50,50) 23(150,-50) 24(150,50) 25(250,-50) 26(250,50) 27(350,-50) 28(350,50) 29(450,-50) 30(450,50) 31(550,-50) 32(550,50) 33(650,-50) 34(650,50) 35(750,-50) 36(750,50) 37(850,-50) 38(850,50) 39(950,-50) 40(950,50)
  silkscreen extent -1000,-100 1000,100
E0402N#1 [mm]
  rect 0.4x0.55 smd: 1(-0.45,0) 2(0.45,0)
  Top region: 0.318,0.178 0.152,0.013 0.324,-0.159 0.324,0.165 0.318,0.165 0.318,0.178
  Top region: 0.368,0.279 0.095,0.006 0.375,-0.273 0.375,0.267 0.368,0.267 0.368,0.279
  Top region: -0.305,-0.165 -0.14,0 -0.311,0.171 -0.311,-0.152 -0.305,-0.152 -0.305,-0.165
  Top region: -0.356,-0.267 -0.083,0.006 -0.362,0.286 -0.362,-0.254 -0.356,-0.254 -0.356,-0.267
  Top lines w0.051: 0.508,0.191 0.45,0.191 0.317,0.191 ; 0.508,-0.178 0.45,-0.178 0.318,-0.178 ; 0.47,0.152 0.45,0.152 0.279,0.152 ; 0.47,-0.14 0.45,-0.14 0.279,-0.14 ; 0.445,-0.102 0.254,-0.102 ; 0.432,0.114 0.241,0.114 ; 0.419,-0.076 0.229,-0.076 ; 0.406,0.076 0.216,0.076 ; 0.394,-0.051 0.203,-0.051 ; 0.368,0.051 0.178,0.051 ; 0.356,-0.025 0.165,-0.025 ; 0.343,0.025 0.152,0.025 ; 0.33,0 0.14,0 ; -0.127,0.013 -0.318,0.013 ; -0.14,-0.013 -0.33,-0.013 ; -0.152,0.038 -0.343,0.038 ; -0.165,-0.038 -0.356,-0.038 ; -0.191,0.063 -0.381,0.063 ; -0.203,-0.064 -0.394,-0.064 ; -0.216,0.089 -0.406,0.089 ; -0.229,-0.102 -0.419,-0.102 ; -0.241,0.114 -0.432,0.114 ; -0.267,0.152 -0.45,0.152 -0.457,0.152 ; -0.267,-0.14 -0.45,-0.14 -0.457,-0.14 ; -0.305,0.19 -0.45,0.19 -0.495,0.19 ; -0.305,-0.178 -0.45,-0.178 -0.495,-0.178
  silkscreen extent -0.8,-0.4 0.8,0.4
E0402N#2 [mm]
  rect 0.4x0.55 smd: 1(-0.45,0) 2(0.45,0)
  Top region: 0.318,0.178 0.152,0.013 0.324,-0.159 0.324,0.165 0.318,0.165 0.318,0.178
  Top region: 0.368,0.279 0.095,0.006 0.375,-0.273 0.375,0.267 0.368,0.267 0.368,0.279
  Top region: -0.305,-0.165 -0.14,0 -0.311,0.171 -0.311,-0.152 -0.305,-0.152 -0.305,-0.165
  Top region: -0.356,-0.267 -0.083,0.006 -0.362,0.286 -0.362,-0.254 -0.356,-0.254 -0.356,-0.267
  Top lines w0.051: -0.495,0.19 -0.45,0.19 -0.305,0.19 ; 0.318,0.191 0.45,0.191 0.508,0.191 ; -0.457,0.152 -0.45,0.152 -0.267,0.152 ; 0.279,0.152 0.45,0.152 0.47,0.152 ; -0.432,0.114 -0.241,0.114 ; 0.241,0.114 0.432,0.114 ; -0.406,0.089 -0.216,0.089 ; 0.216,0.076 0.406,0.076 ; -0.381,0.063 -0.191,0.063 ; 0.178,0.051 0.368,0.051 ; -0.343,0.038 -0.152,0.038 ; 0.152,0.025 0.343,0.025 ; -0.318,0.013 -0.127,0.013 ; 0.14,0 0.33,0 ; -0.33,-0.013 -0.14,-0.013 ; 0.165,-0.025 0.356,-0.025 ; -0.356,-0.038 -0.165,-0.038 ; 0.203,-0.051 0.394,-0.051 ; -0.394,-0.064 -0.203,-0.064 ; 0.229,-0.076 0.419,-0.076 ; -0.419,-0.102 -0.229,-0.102 ; 0.254,-0.102 0.445,-0.102 ; -0.457,-0.14 -0.45,-0.14 ; -0.267,-0.14 -0.45,-0.14 ; 0.279,-0.14 0.45,-0.14 0.47,-0.14 ; -0.495,-0.178 -0.45,-0.178 ; -0.305,-0.178 -0.45,-0.178 ; 0.318,-0.178 0.45,-0.178 0.508,-0.178 ; -0.45,-0.14 -0.45,-0.14 ; -0.45,-0.178 -0.45,-0.178
  silkscreen extent -0.8,-0.4 0.8,0.4
E0402N#3 [mm]
  rect 0.4x0.55 smd: 1(-0.45,0) 2(0.45,0)
  Top region: 0.317,0.178 0.152,0.013 0.324,-0.159 0.324,0.165 0.317,0.165 0.317,0.178
  Top region: 0.368,0.279 0.095,0.006 0.375,-0.273 0.375,0.267 0.368,0.267 0.368,0.279
  Top region: -0.305,-0.165 -0.14,0 -0.311,0.171 -0.311,-0.152 -0.305,-0.152 -0.305,-0.165
  Top region: -0.356,-0.267 -0.083,0.006 -0.362,0.286 -0.362,-0.254 -0.356,-0.254 -0.356,-0.267
  Top lines w0.051: 0.508,-0.178 0.45,-0.178 0.318,-0.178 ; -0.305,-0.178 -0.45,-0.178 -0.457,-0.178 -0.495,-0.178 ; 0.47,-0.14 0.45,-0.14 0.279,-0.14 ; -0.267,-0.14 -0.45,-0.14 -0.457,-0.14 ; 0.445,-0.102 0.254,-0.102 ; -0.229,-0.102 -0.419,-0.102 ; 0.419,-0.076 0.229,-0.076 ; -0.203,-0.064 -0.394,-0.064 ; 0.394,-0.051 0.203,-0.051 ; -0.165,-0.038 -0.356,-0.038 ; 0.356,-0.025 0.165,-0.025 ; -0.14,-0.013 -0.33,-0.013 ; 0.33,0 0.14,0 ; -0.127,0.013 -0.318,0.013 ; 0.343,0.025 0.152,0.025 ; -0.152,0.038 -0.343,0.038 ; 0.368,0.051 0.178,0.051 ; -0.191,0.063 -0.381,0.063 ; 0.406,0.076 0.216,0.076 ; -0.216,0.089 -0.406,0.089 ; 0.432,0.114 0.241,0.114 ; -0.241,0.114 -0.432,0.114 ; 0.47,0.152 0.45,0.152 0.279,0.152 ; -0.267,0.152 -0.45,0.152 -0.457,0.152 ; 0.508,0.191 0.45,0.191 0.317,0.191 ; -0.305,0.19 -0.45,0.19 -0.495,0.19
  silkscreen extent -0.8,-0.4 0.8,0.4
E0402N#4 [mm]
  rect 0.4x0.55 smd: 1(-0.45,0) 2(0.45,0)
  Top region: 0.317,0.178 0.152,0.013 0.324,-0.159 0.324,0.165 0.317,0.165 0.317,0.178
  Top region: 0.368,0.279 0.095,0.006 0.375,-0.273 0.375,0.267 0.368,0.267 0.368,0.279
  Top region: -0.305,-0.165 -0.14,0 -0.311,0.171 -0.311,-0.152 -0.305,-0.152 -0.305,-0.165
  Top region: -0.356,-0.267 -0.083,0.006 -0.362,0.286 -0.362,-0.254 -0.356,-0.254 -0.356,-0.267
  Top lines w0.051: 0.508,-0.178 0.45,-0.178 0.318,-0.178 ; -0.305,-0.178 -0.357,-0.178 -0.45,-0.178 -0.495,-0.178 ; 0.47,-0.14 0.45,-0.14 0.279,-0.14 ; -0.267,-0.14 -0.395,-0.14 -0.45,-0.14 -0.457,-0.14 ; 0.445,-0.102 0.254,-0.102 ; -0.229,-0.102 -0.419,-0.102 ; 0.419,-0.076 0.229,-0.076 ; -0.203,-0.064 -0.394,-0.064 ; 0.394,-0.051 0.203,-0.051 ; -0.165,-0.038 -0.356,-0.038 ; 0.356,-0.025 0.165,-0.025 ; -0.14,-0.013 -0.33,-0.013 ; 0.33,0 0.14,0 ; -0.127,0.013 -0.318,0.013 ; 0.343,0.025 0.152,0.025 ; -0.152,0.038 -0.343,0.038 ; 0.368,0.051 0.178,0.051 ; -0.191,0.063 -0.381,0.063 ; 0.406,0.076 0.216,0.076 ; -0.216,0.089 -0.406,0.089 ; 0.432,0.114 0.241,0.114 ; -0.241,0.114 -0.432,0.114 ; 0.47,0.152 0.45,0.152 0.279,0.152 ; -0.267,0.152 -0.45,0.152 -0.457,0.152 ; 0.508,0.191 0.45,0.191 0.317,0.191 ; -0.305,0.19 -0.45,0.19 -0.495,0.19
  silkscreen extent -0.8,-0.4 0.8,0.4
E0402N#5 [mm]
  rect 0.4x0.55 smd: 1(-0.45,0) 2(0.45,0)
  Top region: 0.317,0.178 0.152,0.013 0.324,-0.159 0.324,0.165 0.317,0.165 0.317,0.178
  Top region: 0.368,0.279 0.095,0.006 0.375,-0.273 0.375,0.267 0.368,0.267 0.368,0.279
  Top region: -0.305,-0.165 -0.14,0 -0.311,0.171 -0.311,-0.152 -0.305,-0.152 -0.305,-0.165
  Top region: -0.356,-0.267 -0.083,0.006 -0.362,0.286 -0.362,-0.254 -0.356,-0.254 -0.356,-0.267
  Top lines w0.051: 0.508,-0.178 0.45,-0.178 0.318,-0.178 ; -0.305,-0.178 -0.45,-0.178 -0.495,-0.178 ; 0.47,-0.14 0.45,-0.14 0.279,-0.14 ; -0.267,-0.14 -0.45,-0.14 -0.457,-0.14 ; 0.445,-0.102 0.254,-0.102 ; -0.229,-0.102 -0.419,-0.102 ; 0.419,-0.076 0.229,-0.076 ; -0.203,-0.064 -0.394,-0.064 ; 0.394,-0.051 0.203,-0.051 ; -0.165,-0.038 -0.356,-0.038 ; 0.356,-0.025 0.165,-0.025 ; -0.14,-0.013 -0.33,-0.013 ; 0.33,0 0.14,0 ; -0.127,0.013 -0.318,0.013 ; 0.343,0.025 0.152,0.025 ; -0.152,0.038 -0.343,0.038 ; 0.368,0.051 0.178,0.051 ; -0.191,0.063 -0.381,0.063 ; 0.406,0.076 0.216,0.076 ; -0.216,0.089 -0.403,0.089 -0.406,0.089 ; 0.432,0.114 0.241,0.114 ; -0.241,0.114 -0.378,0.114 -0.432,0.114 ; 0.47,0.152 0.45,0.152 0.279,0.152 ; -0.267,0.152 -0.34,0.152 -0.45,0.152 -0.457,0.152 ; 0.508,0.191 0.45,0.191 0.317,0.191 ; -0.305,0.19 -0.45,0.19 -0.495,0.19
  silkscreen extent -0.8,-0.4 0.8,0.4
E0402N#6 [mm]
  rect 0.4x0.55 smd: 1(-0.45,0) 2(0.45,0)
  Top region: 0.318,0.178 0.152,0.013 0.324,-0.159 0.324,0.165 0.318,0.165 0.318,0.178
  Top region: 0.368,0.279 0.095,0.006 0.375,-0.273 0.375,0.267 0.368,0.267 0.368,0.279
  Top region: -0.305,-0.165 -0.14,0 -0.311,0.171 -0.311,-0.152 -0.305,-0.152 -0.305,-0.165
  Top region: -0.356,-0.267 -0.083,0.006 -0.362,0.286 -0.362,-0.254 -0.356,-0.254 -0.356,-0.267
  Top lines w0.051: 0.508,-0.178 0.45,-0.178 0.318,-0.178 ; 0.508,0.19 0.45,0.19 0.318,0.19 ; 0.47,-0.14 0.45,-0.14 0.279,-0.14 ; 0.47,0.152 0.45,0.152 0.279,0.152 ; 0.445,-0.102 0.254,-0.102 ; 0.432,0.114 0.241,0.114 ; 0.419,-0.076 0.229,-0.076 ; 0.406,0.076 0.216,0.076 ; 0.394,-0.051 0.203,-0.051 ; 0.368,0.051 0.178,0.051 ; 0.356,-0.025 0.165,-0.025 ; 0.343,0.025 0.152,0.025 ; 0.33,0 0.14,0 ; -0.127,0.013 -0.318,0.013 ; -0.14,-0.013 -0.33,-0.013 ; -0.152,0.038 -0.343,0.038 ; -0.165,-0.038 -0.356,-0.038 ; -0.191,0.064 -0.381,0.064 ; -0.203,-0.063 -0.394,-0.063 ; -0.216,0.089 -0.406,0.089 ; -0.229,-0.102 -0.419,-0.102 ; -0.241,0.114 -0.432,0.114 ; -0.267,-0.14 -0.45,-0.14 -0.454,-0.14 -0.457,-0.14 ; -0.267,0.152 -0.45,0.152 -0.454,0.152 -0.457,0.152 ; -0.305,-0.178 -0.45,-0.178 -0.454,-0.178 -0.495,-0.178 ; -0.305,0.191 -0.45,0.191 -0.454,0.191 -0.495,0.191
  silkscreen extent -0.8,-0.4 0.8,0.4
ESD0402 [mm]
  rrect0% 0.5x0.5 smd: 1(-0.499,0) 2(0.479,0)
  Top region: -0.267,0.203 -0.064,0 -0.267,-0.203 -0.267,0.203
  Top region: 0.241,0.178 0.064,0 0.241,-0.178 0.241,0.178
  silkscreen extent -0.9,-0.4 0.89,0.4
FPC15PIN-1.0MM-LS1 [mm]
  rect 0.6x1.775 smd: 1(0,0) 2(1,0) 3(2,0) 4(3,0) 5(4,0) 6(5,0) 7(6,0) 8(7,0) 9(8,0) 10(9,0) 11(10,0) 12(11,0) 13(12,0) 14(13,0) 15(14,0) 16(0,-3.125) 17(1,-3.125) 18(2,-3.125) 19(3,-3.125) 20(4,-3.125) 21(5,-3.125) 22(6,-3.125) 23(7,-3.125) 24(8,-3.125) 25(9,-3.125) 26(10,-3.125) 27(11,-3.125) 28(12,-3.125) 29(13,-3.125) 30(14,-3.125)
  silkscreen extent -4.3,-4.4 18.1,1
H2.8MM-1 [mm]
  round 6 / inner round 4.5 / far side round 6 hole 3.6: 1(0,0)
H3.8MM [mm]
  round 6 / inner round 4.1 / far side round 6 hole 3.6: 1(0,0)
HDMIA19_HDMI_01A [mm]
  rect 0.3x2.6 smd: 1(-4.572,-4.508) 2(-4.072,-4.508) 3(-3.572,-4.508) 4(-3.072,-4.508) 5(-2.572,-4.508) 6(-2.072,-4.508) 7(-1.572,-4.508) 8(-1.072,-4.508) 9(-0.572,-4.508) 10(-0.072,-4.508) 11(0.428,-4.508) 12(0.928,-4.508) 13(1.428,-4.508) 14(1.928,-4.508) 15(2.428,-4.508) 16(2.928,-4.508) 17(3.428,-4.508) 18(3.928,-4.508) 19(4.428,-4.508)
  oval 1.5x3.5 hole 0.9 slot 2.7 at 90 deg: 20(7.178,-3.749) 21(-7.322,-3.749)
  oval 1.5x2.5 hole 0.9 slot 1.7 at 90 deg: 22(-7.322,2.212) 23(7.178,2.212)
  silkscreen extent -7.32,-4.51 7.18,7.22
IND-4X4 [mm]
  rect 1.15x4 smd: 1(-1.65,0) 2(1.65,0)
  silkscreen extent -2.35,-2.1 2.35,2.1
IND-6X6 [mm]
  rect 2.5x6 smd: 1(-2.2,0) 2(2.2,0)
  Top keep-out region: -3.5,3 3.45,3 3.45,-3 -3.5,-3 -3.5,3
  silkscreen extent -3.66,-3.21 3.7,3.18
IND-5020 [mm]
  rect 1.4x2.8 smd: 1(-2.2,0) 2(2.2,0)
  silkscreen extent -2.7,-2.55 2.7,2.55
IRM-V538$2F$TR1 [mm]
  rect 0.7x0.9 smd: 1(2.3,-2.31) 2(0.6,-2.31) 3(-1.1,-2.31)
  rect 1.4x1.2 smd: 4(2.28,0.19)
  silkscreen extent -1.83,-2.22 3.47,1.63
L0603 [mil]
  rect 32x36 smd: 1(-30,0) 2(30,0)
  silkscreen extent -60,-30 60,30
LD-020 [mm]
  rect 0.8x2 smd: 1(-0.75,2.225) 2(2.25,2.225) 3(3.75,2.225)
  round 0.8 hole 0.8: 4(0,0) 5(3,0)
  rect 1.4x0.8 smd: 6(-2.175,1.125) 7(5.175,1.125) 8(5.175,-1.125) 9(-2.175,-1.125)
  silkscreen extent -1.47,-1.48 4.45,1.56
LED0603 [mm]
  rect 0.9x0.9 smd: 1(-0.8,0) 2(0.8,0)
  silkscreen extent -2.16,-0.65 1.4,0.65
M2_NGFF_KEY_E [mm]
  rect 0.3x1.6 smd: 1(-9.25,3.725) 2(-9,-3.725) 3(-8.75,3.725) 4(-8.5,-3.725) 5(-8.25,3.725) 6(-8,-3.725) 7(-7.75,3.725) 8(-7.5,-3.725) 9(-7.25,3.725) 10(-7,-3.725) 11(-6.75,3.725) 12(-6.5,-3.725) 13(-6.25,3.725) 14(-6,-3.725) 15(-5.75,3.725) 16(-5.5,-3.725) 17(-5.25,3.725) 18(-5,-3.725) 19(-4.75,3.725) 20(-4.5,-3.725) 21(-4.25,3.725) 22(-4,-3.725) 23(-3.75,3.725) 32(-1.5,-3.725) 33(-1.25,3.725) 34(-1,-3.725) 35(-0.75,3.725) 36(-0.5,-3.725) 37(-0.25,3.725) 38(0,-3.725) 39(0.25,3.725) 40(0.5,-3.725) 41(0.75,3.725) 42(1,-3.725) 43(1.25,3.725) 44(1.5,-3.725) 45(1.75,3.725) 46(2,-3.725) 47(2.25,3.725) 48(2.5,-3.725) 49(2.75,3.725) 50(3,-3.725) 51(3.25,3.725) 52(3.5,-3.725) 53(3.75,3.725) 54(4,-3.725) 55(4.25,3.725) 56(4.5,-3.725) 57(4.75,3.725) 58(5,-3.725) 59(5.25,3.725) 60(5.5,-3.725) 61(5.75,3.725) 62(6,-3.725) 63(6.25,3.725) 64(6.5,-3.725) 65(6.75,3.725) 66(7,-3.725) 67(7.25,3.75) 68(7.5,-3.725) 69(7.75,3.725) 70(8,-3.725) 71(8.25,3.725) 72(8.5,-3.725) 73(8.75,3.725) 74(9,-3.725) 75(9.25,3.725)
  rect 1.2x2.8 smd: 76(10.35,3.025) 77(-10.35,3.025)
  round 1.2 hole 1.2 unplated: 78(-10,-1.475)
  round 1.7 hole 1.7 unplated: 79(10,-1.475)
  silkscreen extent -10.95,-3.17 10.95,1.57
M2_NGFF_KEY_M [mm]
  rect 0.3x1.55 smd: 1(-9.25,3.725) 2(-9,-3.725) 3(-8.75,3.725) 4(-8.5,-3.725) 5(-8.25,3.725) 6(-8,-3.725) 7(-7.75,3.725) 8(-7.5,-3.725) 9(-7.25,3.725) 10(-7,-3.725) 11(-6.75,3.725) 12(-6.5,-3.725) 13(-6.25,3.725) 14(-6,-3.725) 15(-5.75,3.725) 16(-5.5,-3.725) 17(-5.25,3.725) 18(-5,-3.725) 19(-4.75,3.725) 20(-4.5,-3.725) 21(-4.25,3.725) 22(-4,-3.725) 23(-3.75,3.725) 24(-3.5,-3.725) 25(-3.25,3.725) 26(-3,-3.725) 27(-2.75,3.725) 28(-2.5,-3.725) 29(-2.25,3.725) 30(-2,-3.725) 31(-1.75,3.725) 32(-1.5,-3.725) 33(-1.25,3.725) 34(-1,-3.725) 35(-0.75,3.725) 36(-0.5,-3.725) 37(-0.25,3.725) 38(0,-3.725) 39(0.25,3.725) 40(0.5,-3.725) 41(0.75,3.725) 42(1,-3.725) 43(1.25,3.725) 44(1.5,-3.725) 45(1.75,3.725) 46(2,-3.725) 47(2.25,3.725) 48(2.5,-3.725) 49(2.75,3.725) 50(3,-3.725) 51(3.25,3.725) 52(3.5,-3.725) 53(3.75,3.725) 54(4,-3.725) 55(4.25,3.725) 56(4.5,-3.725) 57(4.75,3.725) 58(5,-3.725) 67(7.25,3.75) 68(7.5,-3.725) 69(7.75,3.725) 70(8,-3.725) 71(8.25,3.725) 72(8.5,-3.725) 73(8.75,3.725) 74(9,-3.725) 75(9.25,3.725)
  rect 1.2x2.8 smd: 76(10.35,3.025) 77(-10.35,3.025)
  round 1.2 hole 1.2 unplated: 78(-10,-1.475)
  round 1.7 hole 1.7 unplated: 79(10,-1.475)
  silkscreen extent -9.3,-2.7 8.8,2.7
MARK-1 [mm]
  round 1 smd: 1(0,0)
  silkscreen extent -1.65,-1.65 1.65,1.65
MSOP8 [mm]
  rect 1x0.4 smd: 1(-2.4,0.947) 2(-2.4,0.297) 3(-2.4,-0.353) 4(-2.4,-1.003) 5(2.4,-1.003) 6(2.4,-0.353) 7(2.4,0.297) 8(2.4,0.947)
  silkscreen extent -3.36,-1.52 3.05,2.03
PH2P0-2X15-S30P [mm]
  rect 1.1x1.1 / inner rect 1.1x1.1 / far side rect 1.5x1.5 hole 0.8: 1(0,0)
  rrect100% 1.1x1.1 / inner rrect100% 1.1x1.1 / far side rrect100% 1.5x1.5 hole 0.8: 2(0,2) 3(2,0) 4(2,2) 5(4,0) 6(4,2) 7(6,0) 8(6,2) 9(8,0) 10(8,2) 11(10,0) 12(10,2) 13(12,0) 14(12,2) 15(14,0) 16(14,2) 17(16,0) 18(16,2) 19(18,0) 20(18,2) 21(20,0) 22(20,2) 23(22,0) 24(22,2) 25(24,0) 26(24,2) 27(26,0) 28(26,2) 29(28,0) 30(28,2)
  silkscreen extent -1.22,-2.57 29.02,3.2
PJ-327A [mm]
  round 1.5 hole 1.5: 1(0,0) 8(7,0)
  oval 2x1.2 / inner oval 1.6x0.8 / far side oval 2x1.2 hole 0.7 slot 1.5 at 0 deg: 2(-0.2,2.05) 5(-0.2,-2.65)
  rect 1.3x2 smd: 3(6.8,3.55) 4(9.1,3.55) 6(3.1,-3.55) 7(8.6,-3.55)
  silkscreen extent -4.6,-3.2 9.6,3.2
QFN12_2R00X3R00X1R00 [mm]
  rect 1.5x0.25 smd mask+0.025: 1(-0.55,0.5) 2(-0.55,-0.5) 7(0.55,0)
  rect 0.25x0.7 smd mask+0.025: 3(-0.75,-1.45) 4(-0.25,-1.45) 5(0.25,-1.45) 6(0.75,-1.45) 9(0.75,1.45) 10(0.25,1.45) 11(-0.25,1.45) 12(-0.75,1.45)
  rect 0.7x0.25 smd mask+0.025: 8(0.95,0.5)
  silkscreen extent -1.81,0.33 -1.5,0.64
QFN32P4X4 [mm]
  rect 0.75x0.23 smd: 1(-2.025,1.4) 2(-2.025,1) 3(-2.025,0.6) 4(-2.025,0.2) 5(-2.025,-0.2) 6(-2.025,-0.6) 7(-2.025,-1) 8(-2.025,-1.4) 17(2.025,-1.4) 18(2.025,-1) 19(2.025,-0.6) 20(2.025,-0.2) 21(2.025,0.2) 22(2.025,0.6) 23(2.025,1) 24(2.025,1.4)
  rect 0.23x0.75 smd: 9(-1.4,-1.95) 10(-1,-1.95) 11(-0.6,-1.95) 12(-0.2,-1.95) 13(0.2,-1.95) 14(0.6,-1.95) 15(1,-1.95) 16(1.4,-1.95) 25(1.4,1.95) 26(1,1.95) 27(0.6,1.95) 28(0.2,1.95) 29(-0.2,1.95) 30(-0.6,1.95) 31(-1,1.95) 32(-1.4,1.95)
  rect 2.2x2.2 smd: 33(0,0)
  silkscreen extent -2,-2 2,2
R0402 [mm]
  rect 0.5x0.5 smd: 1(-0.45,0) 2(0.45,0)
  silkscreen extent -0.8,-0.35 0.8,0.35
R0603 [mil]
  rect 38x31 smd: 1(-31,0) 2(31,0)
  silkscreen extent -62,-27 62,27
R1206 [mm]
  rect 1.6x1.6 smd: 1(-1.6,0) 2(1.5,0)
  silkscreen extent -2.79,-1.27 2.79,1.27
RJ45_HRK1 [mm]
  rect 1.524x1.524 hole 0.9 mask+0.05: 1(0,0)
  round 1.524 / inner round 1.1 / far side round 1.524 hole 0.9 mask+0.05: 2(1.27,-2.54) 3(2.54,0) 4(3.81,-2.54) 5(5.08,0) 6(6.35,-2.54) 7(7.62,0) 8(8.89,-2.54) 9(10.16,0) 10(11.43,-2.54) 11(0,-5.06) 12(2.54,-6.33) 13(8.89,-6.33) 14(11.43,-5.06) 18(12.36,-12.95)
  round 1.524 hole 1.02 mask+0.05: 15(-0.92,-12.95) 16(1.62,-12.95) 17(9.82,-12.95)
  rrect100% 2x2 / inner rrect100% 2.2x2.2 / far side rrect100% 2.2x2.2 hole 1.6 mask+0.15: 19(-2.13,-5.84) 20(13.57,-5.84)
  round 3.25 hole 3.25: 21(0.005,-8.89) 22(11.435,-8.89)
  silkscreen extent -2.33,-19.64 13.77,1.71
S0T-23 [mil]
  rect 36x36 smd: 1(-37.5,-39) 2(37.5,-39)
  rect 36x50 smd: 3(0,41)
  silkscreen extent -55,-50 55,40
SDO-4030 [mm]
  rect 0.4x0.95 smd: 1(0,0) 2(0,1.35) 3(-0.85,1.35) 4(-0.85,0)
  rect 0.254x0.254 smd: 5(-1.636,-1.052)
  Top region: -1.826,-1.225 -1.826,2.575 0.975,2.575 0.975,-0.971 0.721,-1.225 -1.475,-1.225 -1.475,-0.875 0.372,-0.877 0.456,-0.86 0.549,-0.798 0.611,-0.705 0.627,-0.622 0.626,-0.621 0.631,1.97 0.611,2.068 0.555,2.153 0.47,2.21 0.372,2.229 0.372,2.224 -1.225,2.226 -1.24,2.23 -1.333,2.211 -1.412,2.158 -1.465,2.079 -1.484,1.986 -1.481,1.97 -1.479,1.97 -1.479,-1.225 -1.826,-1.225
SMARC-314C-DEL [mm]
  rect 2.4x0.35 smd mask+0.05: 1(-3.7,-40.25) 2(3.95,-40) 3(-3.7,-1.25) 5(3.95,-1) 9(-3.7,-1.75) 10(-3.7,-2.25) 11(-3.7,-2.75) 12(-3.7,-3.25) 13(-3.7,-3.75) 14(-3.7,-4.25) 15(-3.7,-4.75) 16(-3.7,-5.25) 17(-3.7,-5.75) 18(-3.7,-6.25) 19(-3.7,-6.75) 20(-3.7,-7.25) 21(-3.7,-7.75) 22(-3.7,-8.25) 23(-3.7,-8.75) 24(-3.7,-9.25) 25(-3.7,-9.75) 26(-3.7,-10.25) 27(-3.7,-10.75) 28(-3.7,-11.25) 29(-3.7,-11.75) 30(-3.7,-12.25) 31(-3.7,-12.75) 32(-3.7,-13.25) 33(-3.7,-13.75) 34(-3.7,-14.25) 35(-3.7,-14.75) 36(-3.7,-15.25) 37(-3.7,-15.75) 38(-3.7,-16.25) 39(-3.7,-16.75) 40(-3.7,-17.25) 41(-3.7,-17.75) 42(-3.7,-18.25) 43(-3.7,-18.75) 44(-3.7,-19.25) 45(-3.7,-19.75) 46(-3.7,-20.25) 47(-3.7,-20.75) 48(-3.7,-21.25) 49(-3.7,-21.75) 50(-3.7,-22.25) 51(-3.7,-22.75) 52(-3.7,-23.25) 53(-3.7,-23.75) 54(-3.7,-24.25) 55(-3.7,-24.75) 56(-3.7,-25.25) 57(-3.7,-25.75) 58(-3.7,-26.25) 59(-3.7,-26.75) 60(-3.7,-27.25) 61(-3.7,-27.75) 62(-3.7,-28.25) 63(-3.7,-28.75) 64(-3.7,-29.25) 65(-3.7,-29.75) 66(-3.7,-30.25) 67(-3.7,-30.75) 68(-3.7,-31.25) 69(-3.7,-31.75) 70(-3.7,-32.25) 71(-3.7,-32.75) 72(-3.7,-33.25) 73(-3.7,-33.75) 74(-3.7,-34.25) 75(-3.7,-34.75) 76(-3.7,-35.25) 77(-3.7,-35.75) 78(-3.7,-36.25) 79(-3.7,-36.75) 80(-3.7,-37.25) 81(-3.7,-37.75) 82(-3.7,-40.75) 83(-3.7,-41.25) 84(-3.7,-41.75) 85(-3.7,-42.25) 86(-3.7,-42.75) 87(-3.7,-43.25) 88(-3.7,-43.75) 89(-3.7,-44.25) 90(-3.7,-44.75) 91(-3.7,-45.25) 92(-3.7,-45.75) 93(-3.7,-46.25) 94(-3.7,-46.75) 95(-3.7,-47.25) 96(-3.7,-47.75) 97(-3.7,-48.25) 98(-3.7,-48.75) 99(-3.7,-49.25) 100(-3.7,-49.75) 101(-3.7,-50.25) 102(-3.7,-50.75) 103(-3.7,-51.25) 104(-3.7,-51.75) 105(-3.7,-52.25) 106(-3.7,-52.75) 107(-3.7,-53.25) 108(-3.7,-53.75) 109(-3.7,-54.25) 110(-3.7,-54.75) 111(-3.7,-55.25) 112(-3.7,-55.75) 113(-3.7,-56.25) 114(-3.7,-56.75) 115(-3.7,-57.25) 116(-3.7,-57.75) 117(-3.7,-58.25) 118(-3.7,-58.75) 119(-3.7,-59.25) 120(-3.7,-59.75) 121(-3.7,-60.25) 122(-3.7,-60.75) 123(-3.7,-61.25) 124(-3.7,-61.75) 125(-3.7,-62.25) 126(-3.7,-62.75) 127(-3.7,-63.25) 128(-3.7,-63.75) 129(-3.7,-64.25) 130(-3.7,-64.75) 131(-3.7,-65.25) 132(-3.7,-65.75) 133(-3.7,-66.25) 134(-3.7,-66.75) 135(-3.7,-67.25) 136(-3.7,-67.75) 137(-3.7,-68.25) 138(-3.7,-68.75) 139(-3.7,-69.25) 140(-3.7,-69.75) 141(-3.7,-70.25) 142(-3.7,-70.75) 143(-3.7,-71.25) 144(-3.7,-71.75) 145(-3.7,-72.25) 146(-3.7,-72.75) 147(-3.7,-73.25) 148(-3.7,-73.75) 149(-3.7,-74.25) 150(-3.7,-74.75) 151(-3.7,-75.25) 152(-3.7,-75.75) 153(-3.7,-76.25) 154(-3.7,-76.75) 155(-3.7,-77.25) 156(-3.7,-77.75) 157(-3.7,-78.25) 158(-3.7,-78.75) 159(-3.7,-79.25) 160(-3.7,-79.75) 161(-3.7,-80.25) 162(-3.7,-80.75) 163(3.95,-1.5) 164(3.95,-2) 165(3.95,-2.5) 166(3.95,-3) 167(3.95,-3.5) 168(3.95,-4) 169(3.95,-4.5) 170(3.95,-5) 171(3.95,-5.5) 172(3.95,-6) 173(3.95,-6.5) 174(3.95,-7) 175(3.95,-7.5) 176(3.95,-8) 177(3.95,-8.5) 178(3.95,-9) 179(3.95,-9.5) 180(3.95,-10) 181(3.95,-10.5) 182(3.95,-11) 183(3.95,-11.5) 184(3.95,-12) 185(3.95,-12.5) 186(3.95,-13) 187(3.95,-13.5) 188(3.95,-14) 189(3.95,-14.5) 190(3.95,-15) 191(3.95,-15.5) 192(3.95,-16) 193(3.95,-16.5) 194(3.95,-17) 195(3.95,-17.5) 196(3.95,-18) 197(3.95,-18.5) 198(3.95,-19) 199(3.95,-19.5) 200(3.95,-20) 201(3.95,-20.5) 202(3.95,-21) 203(3.95,-21.5) 204(3.95,-22) 205(3.95,-22.5) 206(3.95,-23) 207(3.95,-23.5) 208(3.95,-24) 209(3.95,-24.5) 210(3.95,-25) 211(3.95,-25.5) 212(3.95,-26) 213(3.95,-26.5) 214(3.95,-27) 215(3.95,-27.5) 216(3.95,-28) 217(3.95,-28.5) 218(3.95,-29) 219(3.95,-29.5) 220(3.95,-30) 221(3.95,-30.5) 222(3.95,-31) 223(3.95,-31.5) 224(3.95,-32) 225(3.95,-32.5) 226(3.95,-33) 227(3.95,-33.5) 228(3.95,-34) 229(3.95,-34.5) 230(3.95,-35) 231(3.95,-35.5) 232(3.95,-36) 233(3.95,-36.5) 234(3.95,-37) 235(3.95,-37.5) 236(3.95,-38) 237(3.95,-40.5) 238(3.95,-41) 239(3.95,-41.5) 240(3.95,-42) 241(3.95,-42.5) 242(3.95,-43) 243(3.95,-43.5) 244(3.95,-44) 245(3.95,-44.5) 246(3.95,-45) 247(3.95,-45.5) 248(3.95,-46) 249(3.95,-46.5) 250(3.95,-47) 251(3.95,-47.5) 252(3.95,-48) 253(3.95,-48.5) 254(3.95,-49) 255(3.95,-49.5) 256(3.95,-50) 257(3.95,-50.5) 258(3.95,-51) 259(3.95,-51.5) 260(3.95,-52) 261(3.95,-52.5) 262(3.95,-53) 263(3.95,-53.5) 264(3.95,-54) 265(3.95,-54.5) 266(3.95,-55) 267(3.95,-55.5) 268(3.95,-56) 269(3.95,-56.5) 270(3.95,-57) 271(3.95,-57.5) 272(3.95,-58) 273(3.95,-58.5) 274(3.95,-59) 275(3.95,-59.5) 276(3.95,-60) 277(3.95,-60.5) 278(3.95,-61) 279(3.95,-61.5) 280(3.95,-62) 281(3.95,-62.5) 282(3.95,-63) 283(3.95,-63.5) 284(3.95,-64) 285(3.95,-64.5) 286(3.95,-65) 287(3.95,-65.5) 288(3.95,-66) 289(3.95,-66.5) 290(3.95,-67) 291(3.95,-67.5) 292(3.95,-68) 293(3.95,-68.5) 294(3.95,-69) 295(3.95,-69.5) 296(3.95,-70) 297(3.95,-70.5) 298(3.95,-71) 299(3.95,-71.5) 300(3.95,-72) 301(3.95,-72.5) 302(3.95,-73) 303(3.95,-73.5) 304(3.95,-74) 305(3.95,-74.5) 306(3.95,-75) 307(3.95,-75.5) 308(3.95,-76) 309(3.95,-76.5) 310(3.95,-77) 311(3.95,-77.5) 312(3.95,-78) 313(3.95,-78.5) 314(3.95,-79) 315(3.95,-79.5) 316(3.95,-80) 317(3.95,-80.5) 318(3.95,-81)
  rect 5.15x3 smd mask+0.05: 4(-0.75,-85) 8(-0.75,3)
  round 1.1 hole 1.1 unplated: 6(0,-82)
  round 1.6 hole 1.6 unplated: 7(0,0)
  round 6 / inner round 4.5 / far side round 6 hole 3.6: 319(12,-4) 321(46,-4) 322(46,-78)
  round 0.2 smd: 320(12,-78)
  silkscreen extent -5.35,-86.86 50,5.03
SMD-2P-1.25 [mm]
  rect 0.6x2.5 smd: 1(0.625,0.25) 2(-0.625,0.25)
  rect 2x2.7 smd: 3(-3.1,-3) 4(3.1,-3)
  silkscreen extent -3.14,-5.26 3.59,-0.23
SOD323 [mm]
  rect 0.63x0.83 smd: 1(-1.115,0) 2(1.115,0)
  silkscreen extent -1.6,-0.7 1.84,0.7
SOD_123 [mm]
  rect 1x1 smd mask+0.05: 1(-1.8,0) 2(1.8,0)
  silkscreen extent -1.11,-0.9 1.13,0.9
SOD_323 [mm]
  rect 0.8x0.6 smd mask+0.05: 1(-1.2,0) 2(1.2,0)
  silkscreen extent -0.67,-0.65 0.64,0.65
SON10_2R50X1R00X0R50 [mm]
  rect 0.2x0.675 smd mask+0.05: 1(-1,-0.437) 2(-0.5,-0.437) 4(0.5,-0.437) 5(1,-0.437) 6(1,0.437) 7(0.5,0.437) 9(-0.5,0.437) 10(-1,0.437)
  rect 0.4x0.775 smd mask+0.05: 3(0,-0.387) 8(0,0.388)
  silkscreen extent -1.25,-0.5 1.25,0.5
SOP8-50-150 [mil]
  rect 25x70 smd: 1(-75,-105) 2(-25,-105) 3(25,-105) 4(75,-105) 5(75,105) 6(25,105) 7(-25,105) 8(-75,105)
  silkscreen extent -100,-173 100,80
SOT23 [mil]
  rect 39x39 smd: 1(-38,-46.5) 2(38,-46.5)
  rect 39x47.24 smd: 3(0,42.56)
  silkscreen extent -59,-21 59,21
SOT23-8 [mm]
  rect 0.35x0.9 smd: 1(-0.975,-1.35) 2(-0.325,-1.35) 3(0.325,-1.35) 4(0.975,-1.35) 5(0.975,1.35) 6(0.325,1.35) 7(-0.325,1.35) 8(-0.975,1.35)
  silkscreen extent -1.4,-0.5 1.4,0.5
SOT25 [mm]
  oval 0.6x1.1 smd: 1(-0.95,-1.4)
  rect 0.6x1.1 smd: 2(0,-1.4) 3(0.95,-1.4) 4(0.95,1.4) 5(-0.95,1.4)
  silkscreen extent -1.5,-0.52 1.5,0.55
SOT_23 [mm]
  rect 0.8x1.1 smd: 1(0.95,1.1) 2(-0.95,1.1) 3(0,-1.1)
  silkscreen extent -1.6,-0.9 1.6,0.9
SOT_23_5 [mm]
  oval 1.1x0.6 smd mask+0.064: 1(0,0)
  rect 1.1x0.6 smd mask+0.064: 2(0,-1) 3(0,-2) 4(2.8,-2) 5(2.8,0)
  silkscreen extent -0.55,-2.5 3.35,0.5
SOT_323 [mm]
  rect 0.7x0.9 smd mask+0.05: 1(-0.65,-0.95) 2(0.65,-0.95) 3(0,0.95)
  silkscreen extent -1.1,-0.67 1.1,0.67
SW8-KEY [mm]
  rect 0.7x1.2 smd: 1(1.753,1.425) 2(-1.647,1.425)
  rect 1.6x1.4 smd: 3(2.25,-0.522) 4(-2.25,-0.532)
  round 0.65 hole 0.65: 5(-0.797,0.125) 6(0.903,0.125)
  silkscreen extent -2.25,-1.77 2.25,1.42
SW_4_DIP [mm]
  rrect0% 1.6x1.6 / inner rrect0% 1.6x1.6 / far side rrect0% 1.8x1.8 hole 1: 1(1.28,2.45) 2(5.78,2.45)
  rrect0% 2x2 hole 1.5: 3(0,0) 4(7,0)
  silkscreen extent 0.34,-1.53 6.78,5.06
TF-CKT01-009D [mm]
  rect 1.6x0.7 smd: 1(-10.516,3.2) 2(-10.516,2.1) 3(-10.516,1) 4(-10.516,-0.1) 5(-10.516,-1.2) 6(-10.516,-2.3) 7(-10.516,-3.4) 8(-10.516,-4.5) 9(-10.516,-5.6)
  rect 1.6x1.4 smd: 10(-10.016,-7) 13(-10.016,8.7)
  rect 2.2x1.2 smd: 11(-0.416,-6.8) 12(-0.416,8.7)
  round 0.9 hole 0.9 unplated: 14(0,4) 15(0,-4)
  silkscreen extent -10.52,-6.4 3.98,8.3
TYPEC-16PIN-GY [mm]
  rrect100% 0.65x0.65 / inner round 0.65 / far side round 0.65 hole 0.65 slot 1.1 at 90 deg: 6(-7.195,3.45) 7(-1.445,3.45)
  rect 0.6x1.15 smd: A1(-7.52,4.75) A4(-6.72,4.75) A9(-1.92,4.75) A12(-1.12,4.75) B1(-1.12,4.75) B4(-1.92,4.75) B9(-6.72,4.75) B12(-7.52,4.75)
  rect 0.3x1.15 smd: A5(-5.57,4.75) A6(-4.57,4.75) A7(-4.07,4.75) A8(-6.07,4.75) B5(-2.57,4.75) B6(-3.57,4.75) B7(-5.07,4.75) B8(-3.07,4.75)
  oval 1x1.8 / inner oval 1x1.5 / far side oval 1x1.9 hole 0.6 slot 1.5 at 90 deg: E1(-8.64,0) E2(0,0)
  oval 1x1.9 / inner oval 1x1.8 / far side oval 1x2.1 hole 0.6 slot 1.5 at 90 deg: E3(-8.64,4.15) E4(0,4.15)
  silkscreen extent -8.8,-2.57 0.19,4.72
USB30-L1 [mm]
  rect 0.7x1.6 smd: 1(-3,0) 2(-1,0) 3(1,0) 4(3,0) 5(4,0) 6(2,0) 7(0,0) 8(-2,0) 9(-4,0)
  oval 1.8x3.6 / inner oval 0.7x2.6 / far side oval 1.8x3.6 hole 0.6 slot 2.5 at 90 deg: 10(-6.4,-1) 11(6.4,-1)
  silkscreen extent -6.41,-13.5 6.4,0.92
USB-AF-DUAL [mm]
  round 1.3 / inner round 0.9 / far side round 1.3 hole 0.9: 1(3.18,3.5) 2(3.18,1) 3(3.18,-1) 4(3.18,-3.5) 5(5.68,3.5) 6(5.68,1) 7(5.68,-1) 8(5.68,-3.5)
  round 3.048 / inner round 2.5 / far side round 3.048 hole 2.3: 9(0,6.7)
  round 3.048 / inner round 2.5 / far side round 3.048 hole 2.286: 10(0,-6.7) 11(5.7,6.7) 12(5.7,-6.7)
  silkscreen extent -9.97,-7.52 7.1,7.61

## Via types
v1: diameter 15.75, hole 7.87, Top to Bottom, 1414 vias

## Nets (pads, with @x,y where several pads share a name; then routed paths per layer and width w, separated by ;. In a path a pad name is that pad's centre, name@x,y a point inside that pad or via, vN(x,y) a via of type N, cw(c..) or ccw(c..) an arc to the next point about the centre after c; other vN are vias at no path point)
ADC0_IN0: C39.1 R42.1 R44.2 | length 2981.9
  Top w10: v1(-2840.55,2627.95) -2836.55,2627.95 -2836.55,2567.72 -2835.04,2567.72 ; v1(-2160,2679) -2151,2679 -2149.5,2677.5 -2130,2697 v1(-2130,2721) ; v1(-594,2739) -594,2850 -519,2925 -459.84,2925 -459.84,2925.39 -418.9,2966.34 -383.86,2966.34 -383.86,2967.61 -375.28,2976.18 R44.2@-375.28,2990.16 ; R42.1@-372.28,3072 C39.1@-372.28,3036 -372,3036 -372,2991 -375.28,2991 R44.2@-375.28,2990.16 ; R44.2@-370.47,2988.58 -372.05,2990.16 R44.2@-375.28,2990.16
  Bottom w10: v1(-2840.55,2627.95) -2743.11,2530.51 -2282.99,2530.51 -2170.28,2643.23 -2170.28,2650.93 -2160,2661.2 v1(-2160,2679) ; v1(-2130,2721) -1467,2721 -1446,2742 -1149,2742 -1119,2712 -621,2712 v1(-594,2739)